# Altium PCB Controller.PcbDoc (part 1 of 2)
Units mil, origin at the board's own origin, x right, y up, seen from the top; angles counter-clockwise.
Board outline 3937.01 x 3937.01 mil, 4 copper layers (Top Layer, GND1, Layer 2, GND2), stack 23.756 mil thick; 99 components, 64 nets, 313 pads, 83 vias.
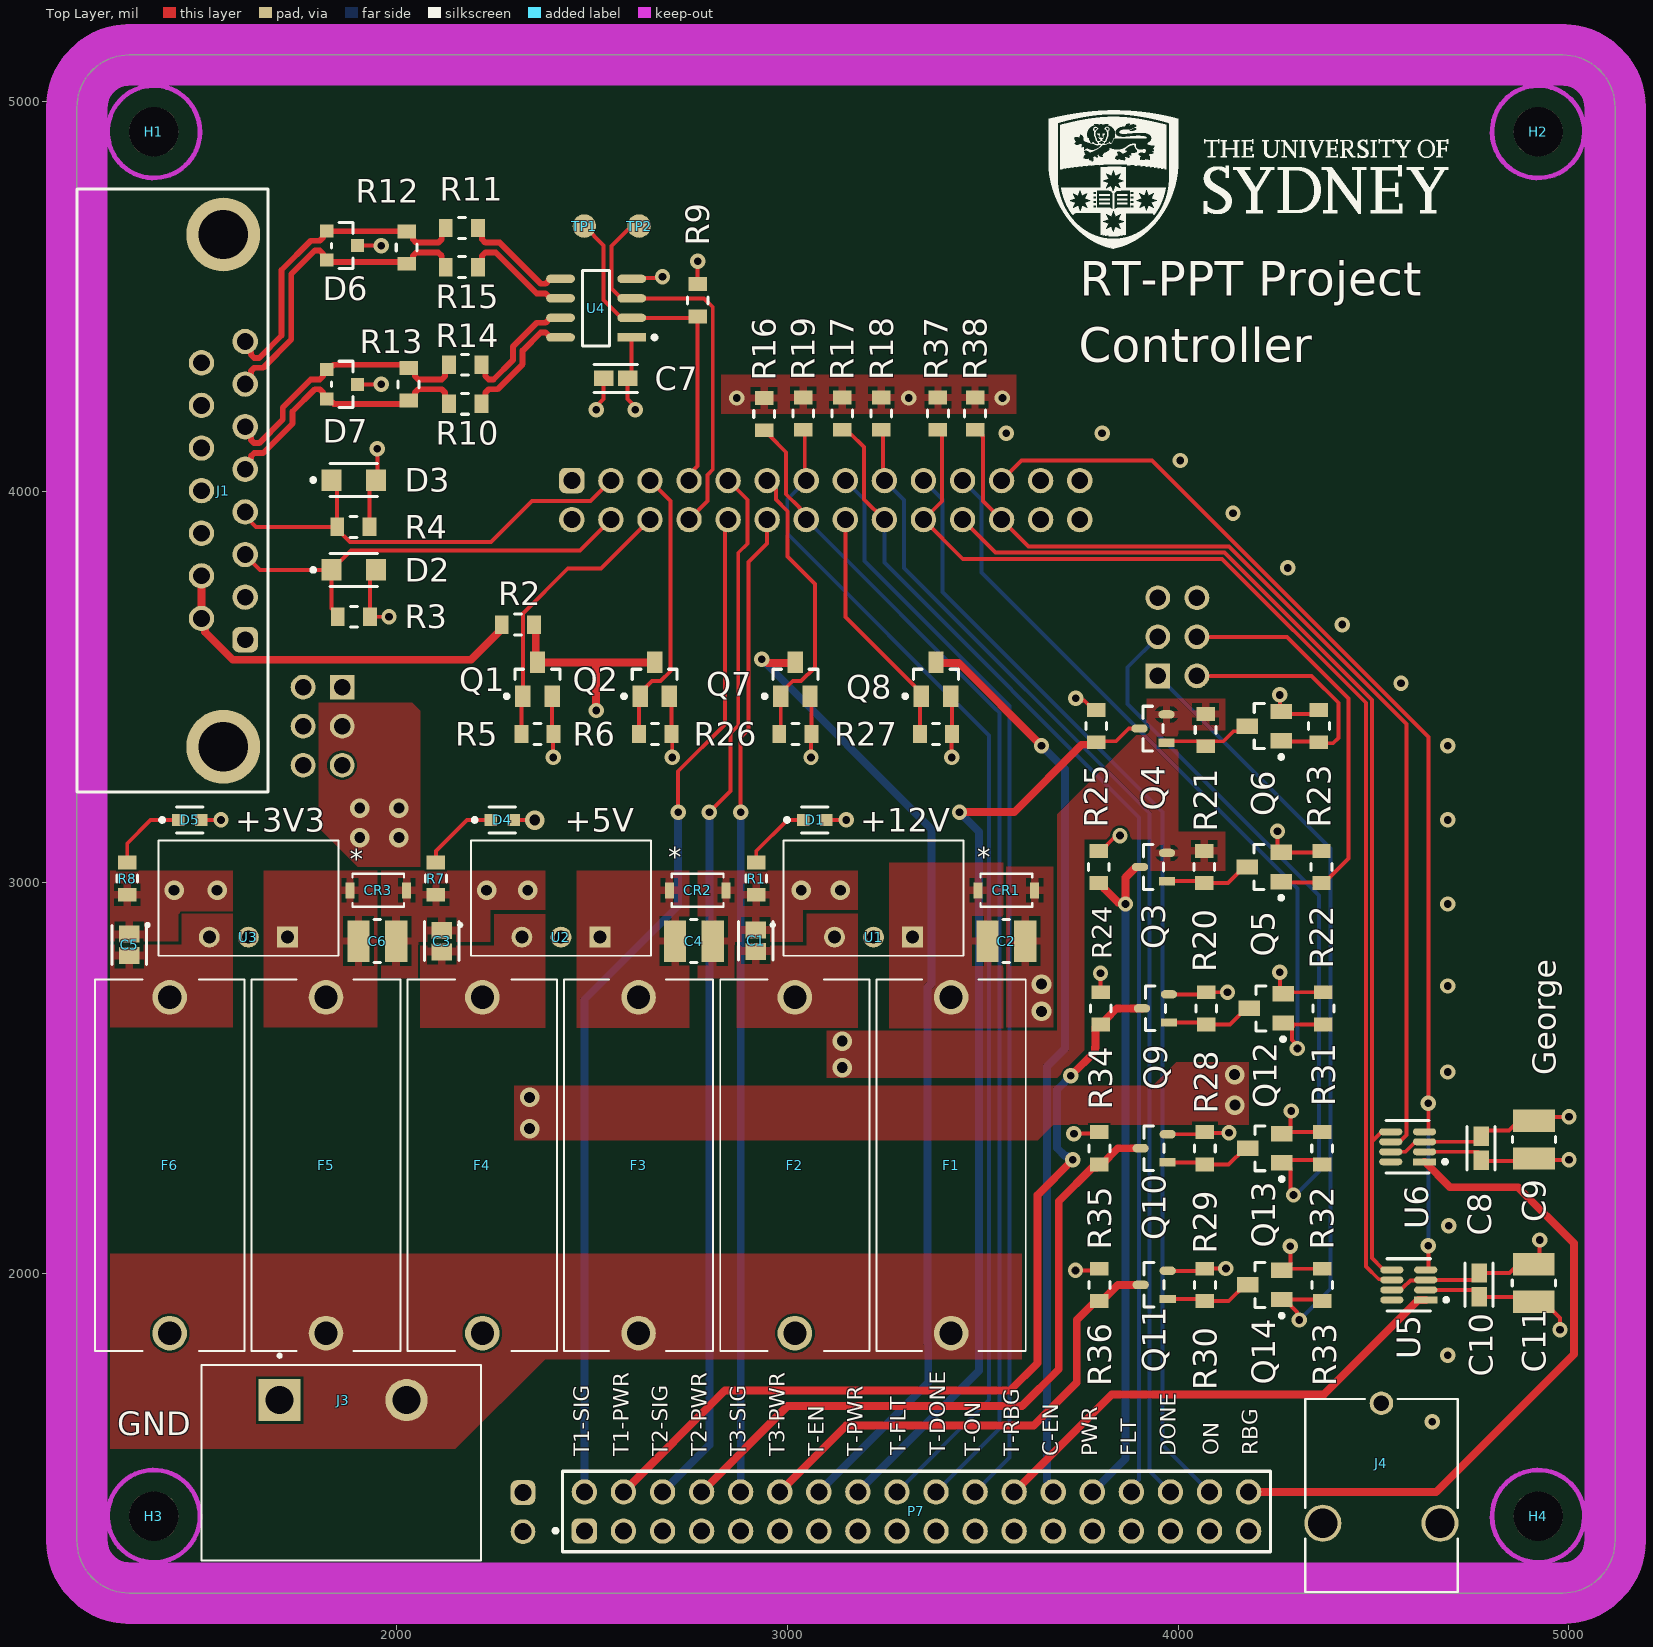
[diagram p0: Top Layer view]
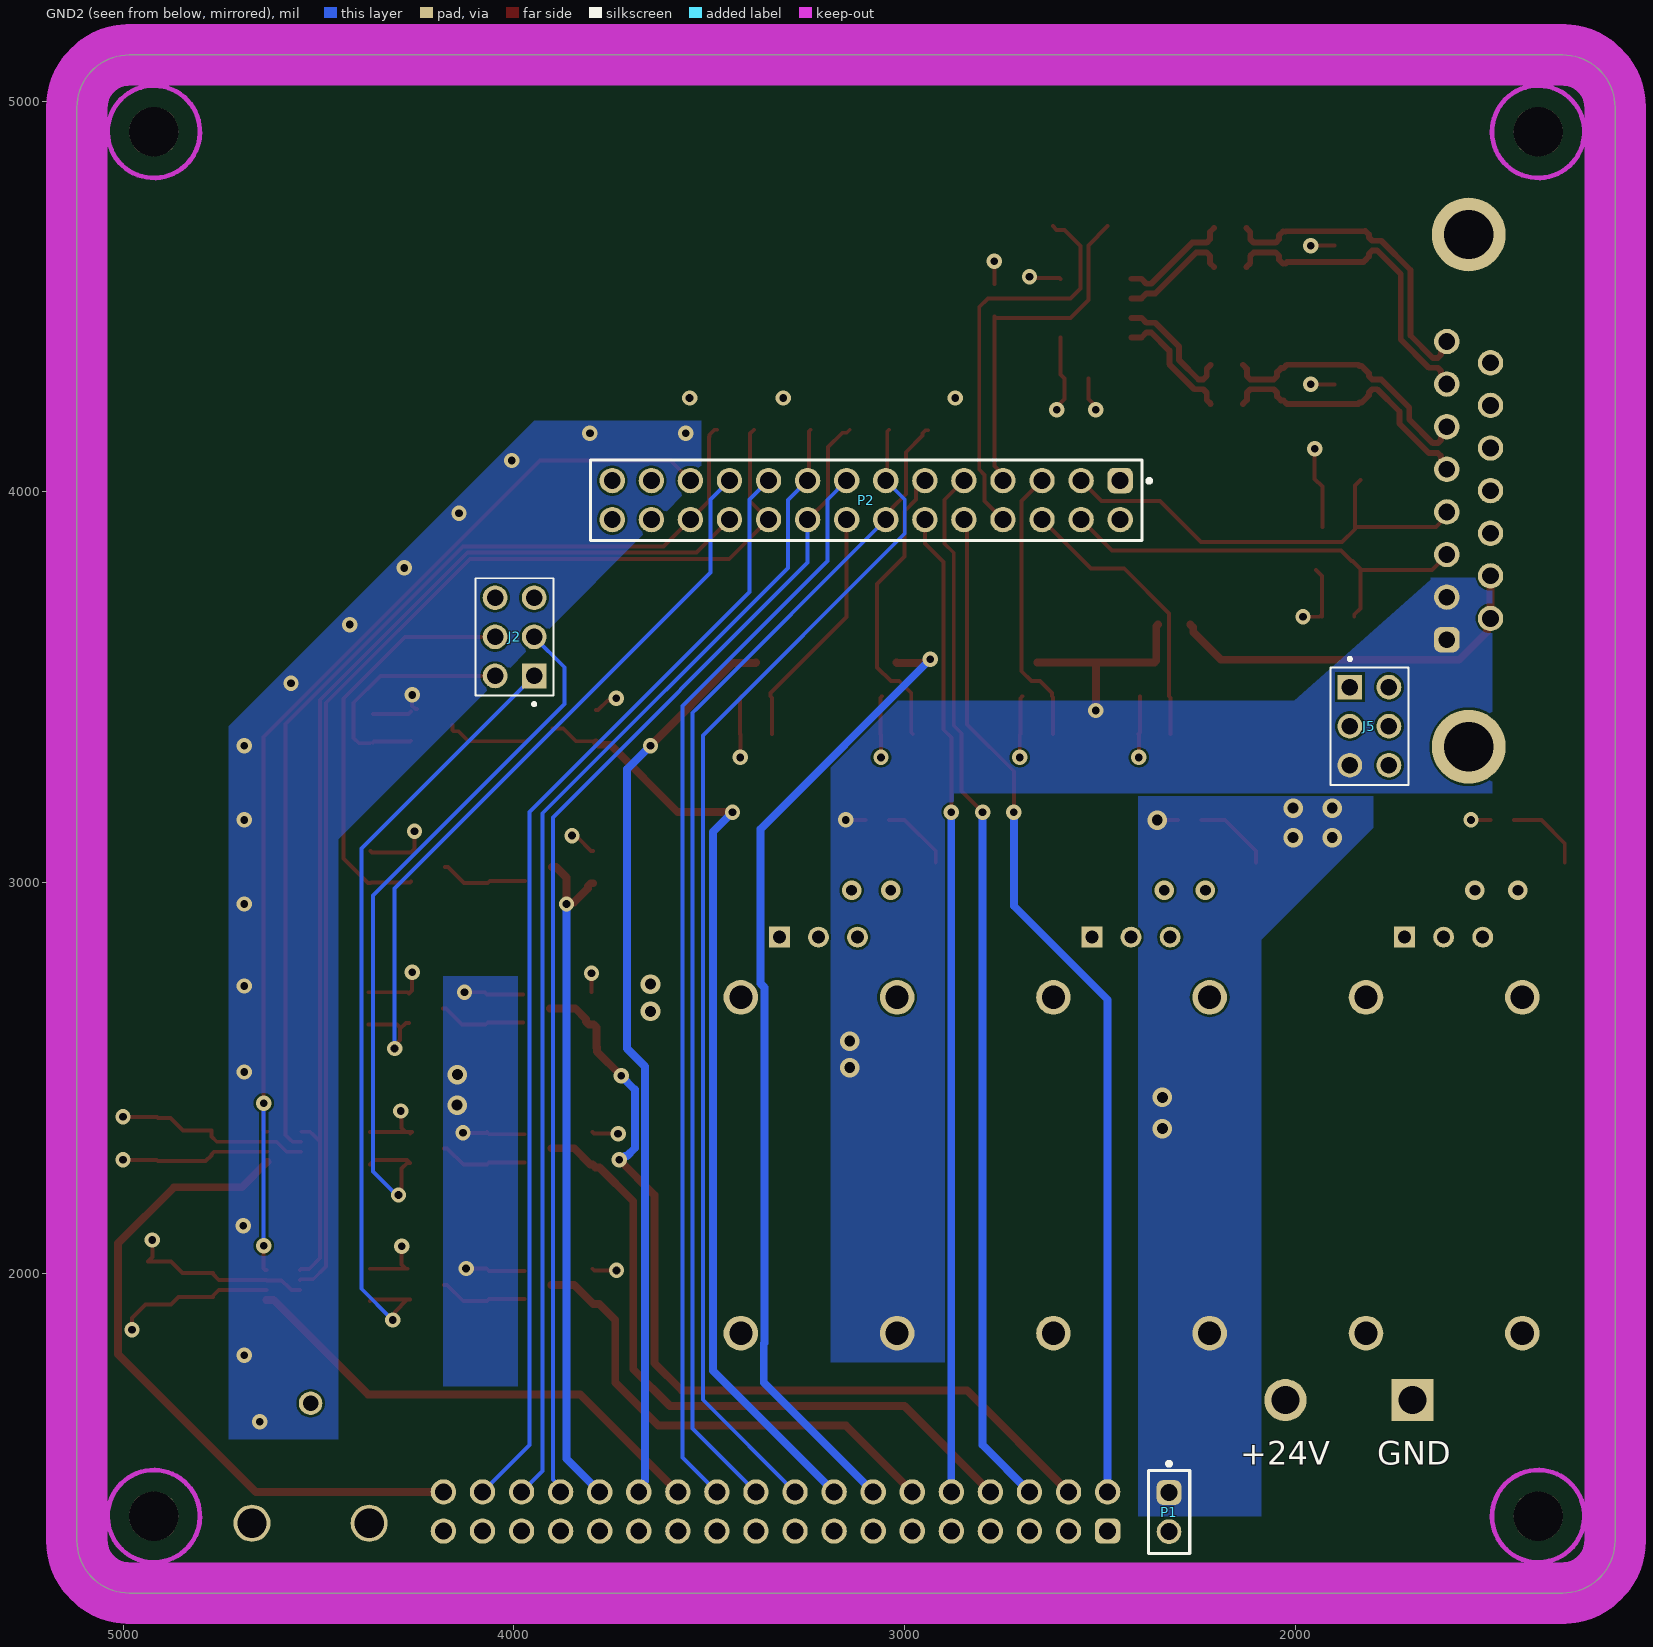
[diagram p1: GND2 view, seen from below]
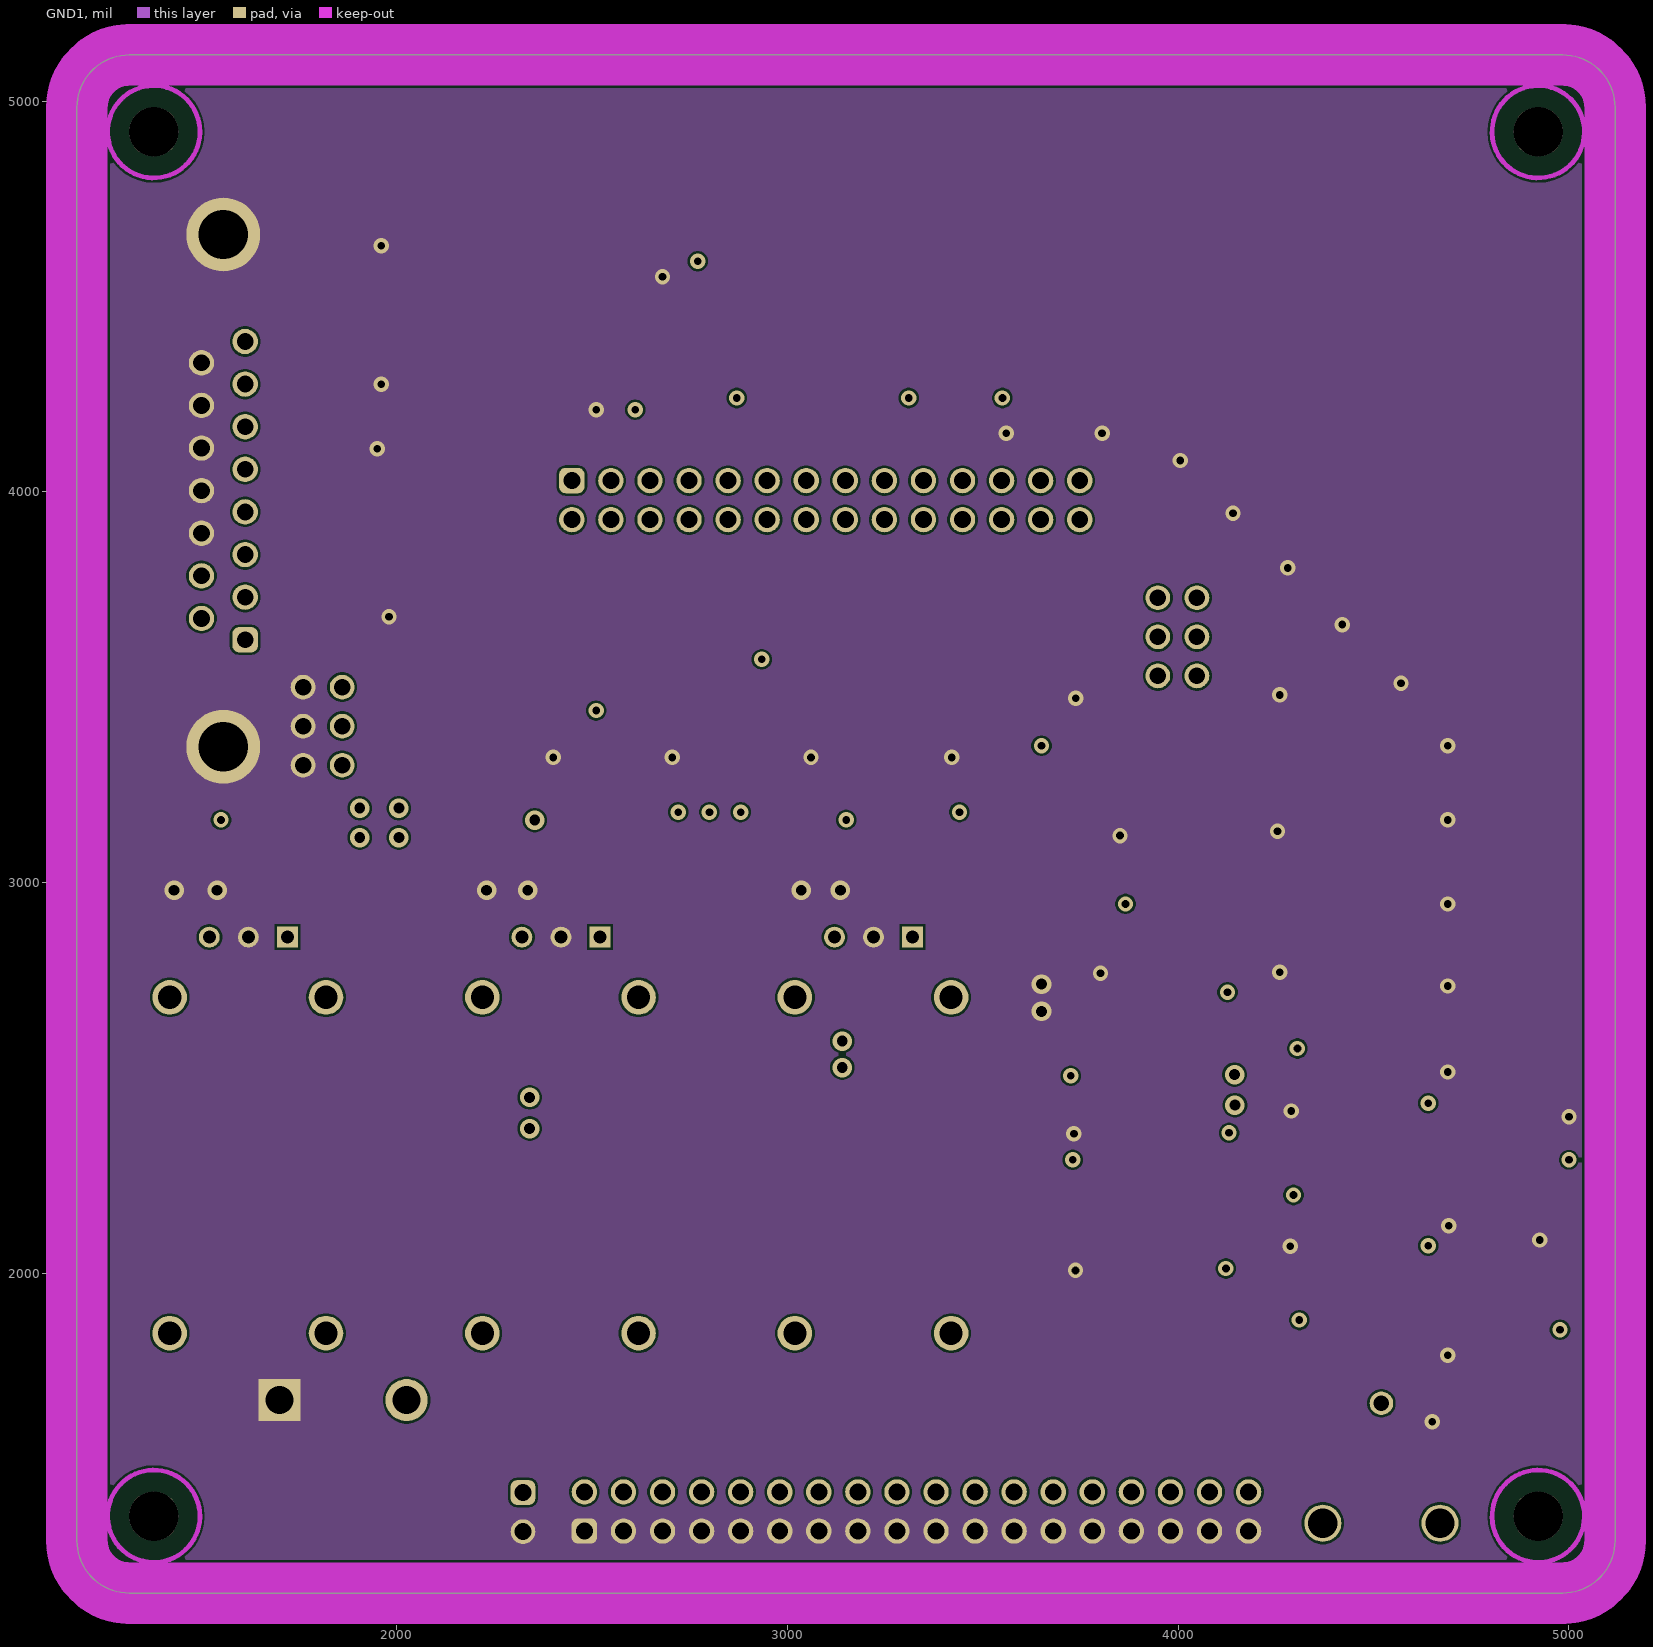
[diagram p2: GND1]
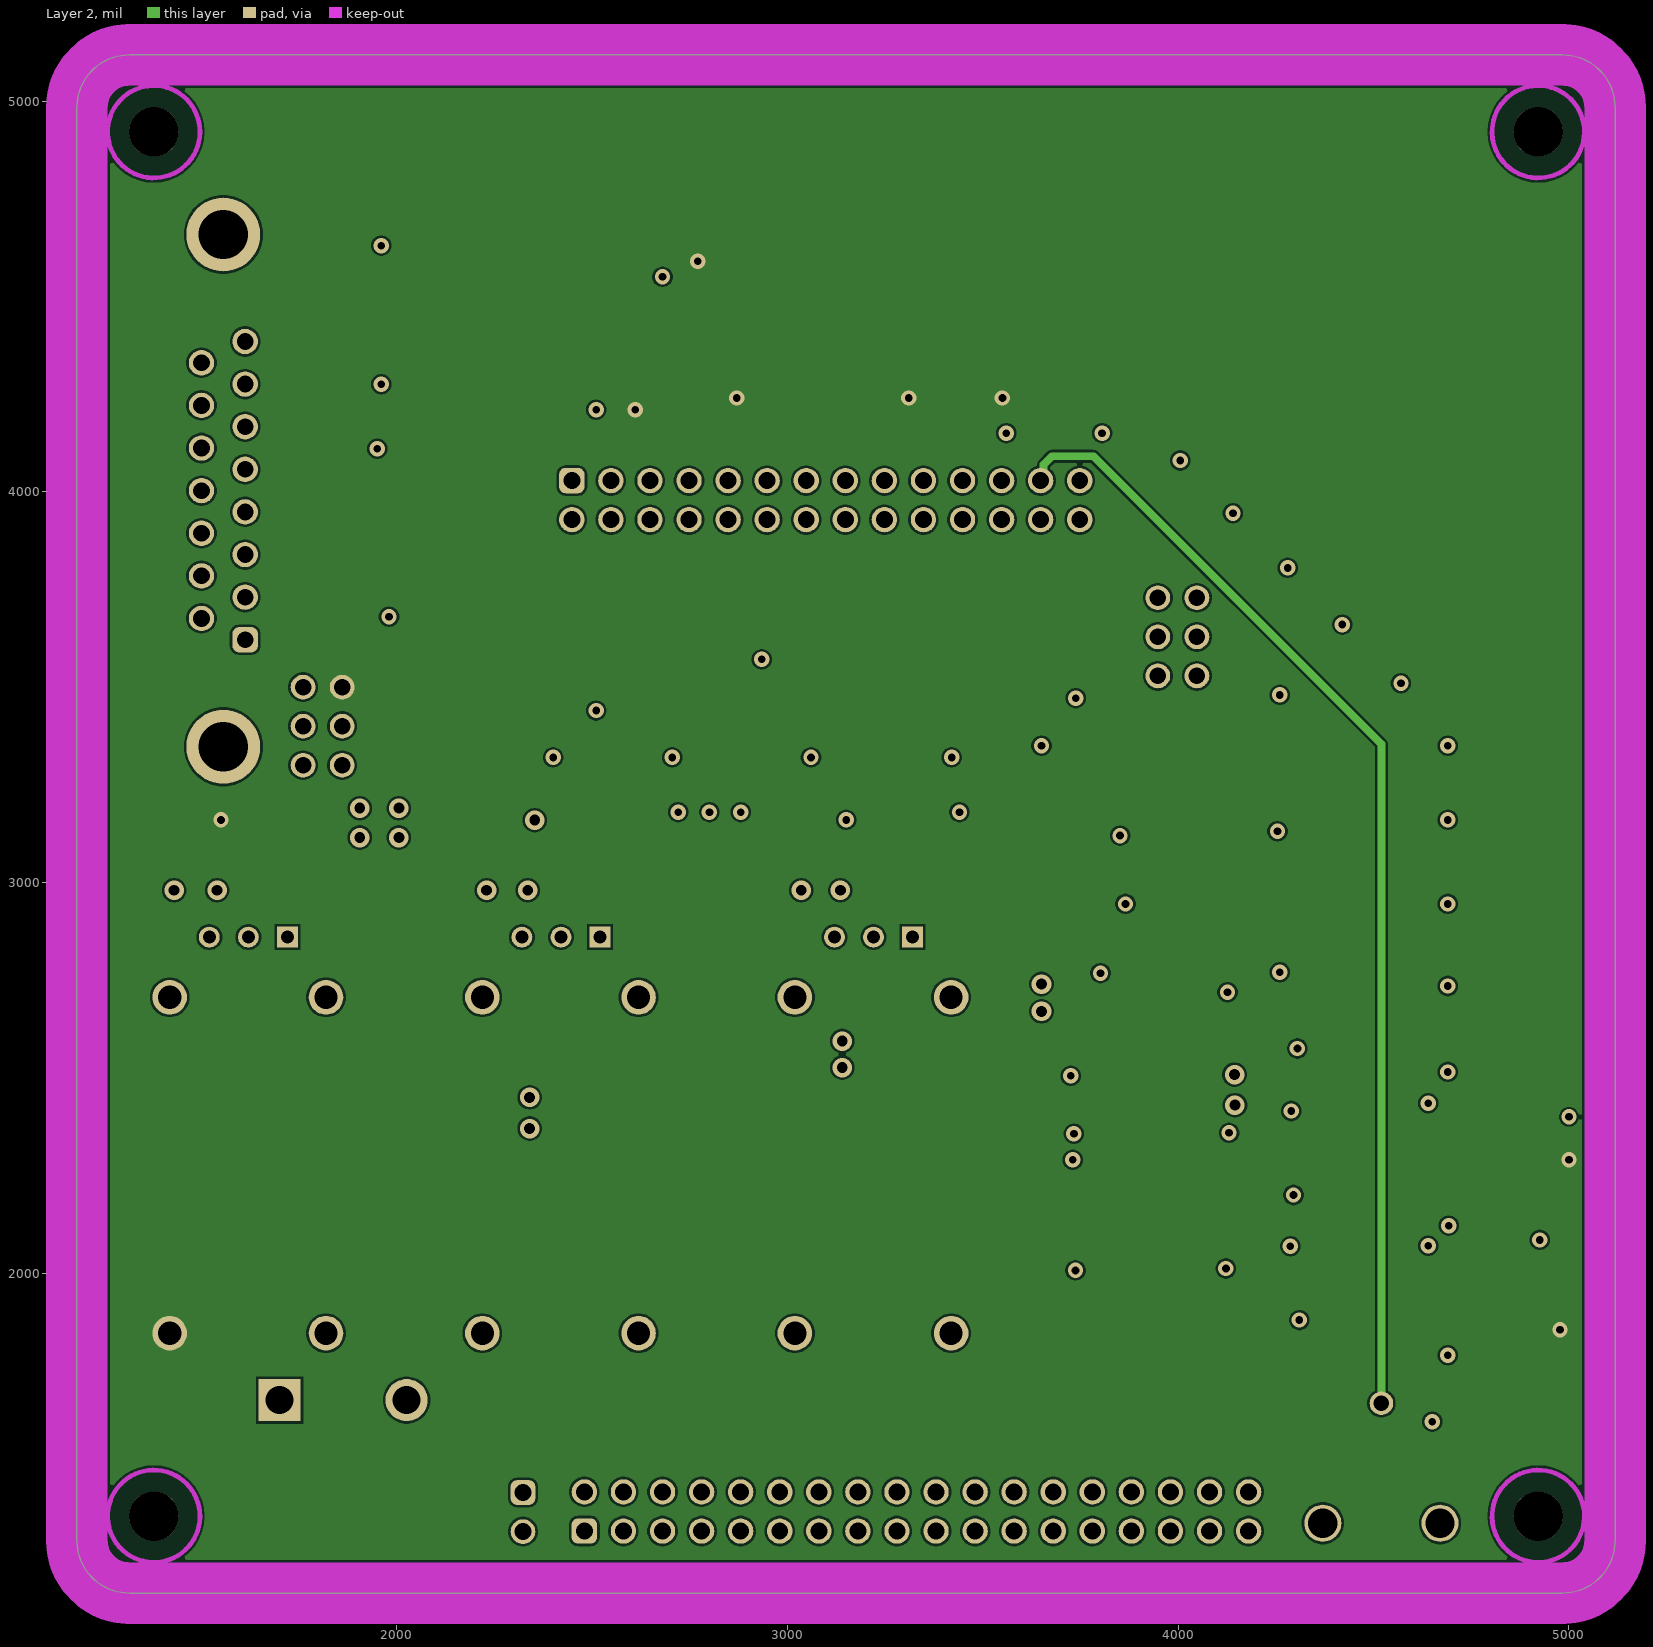
[diagram p3: Layer 2]
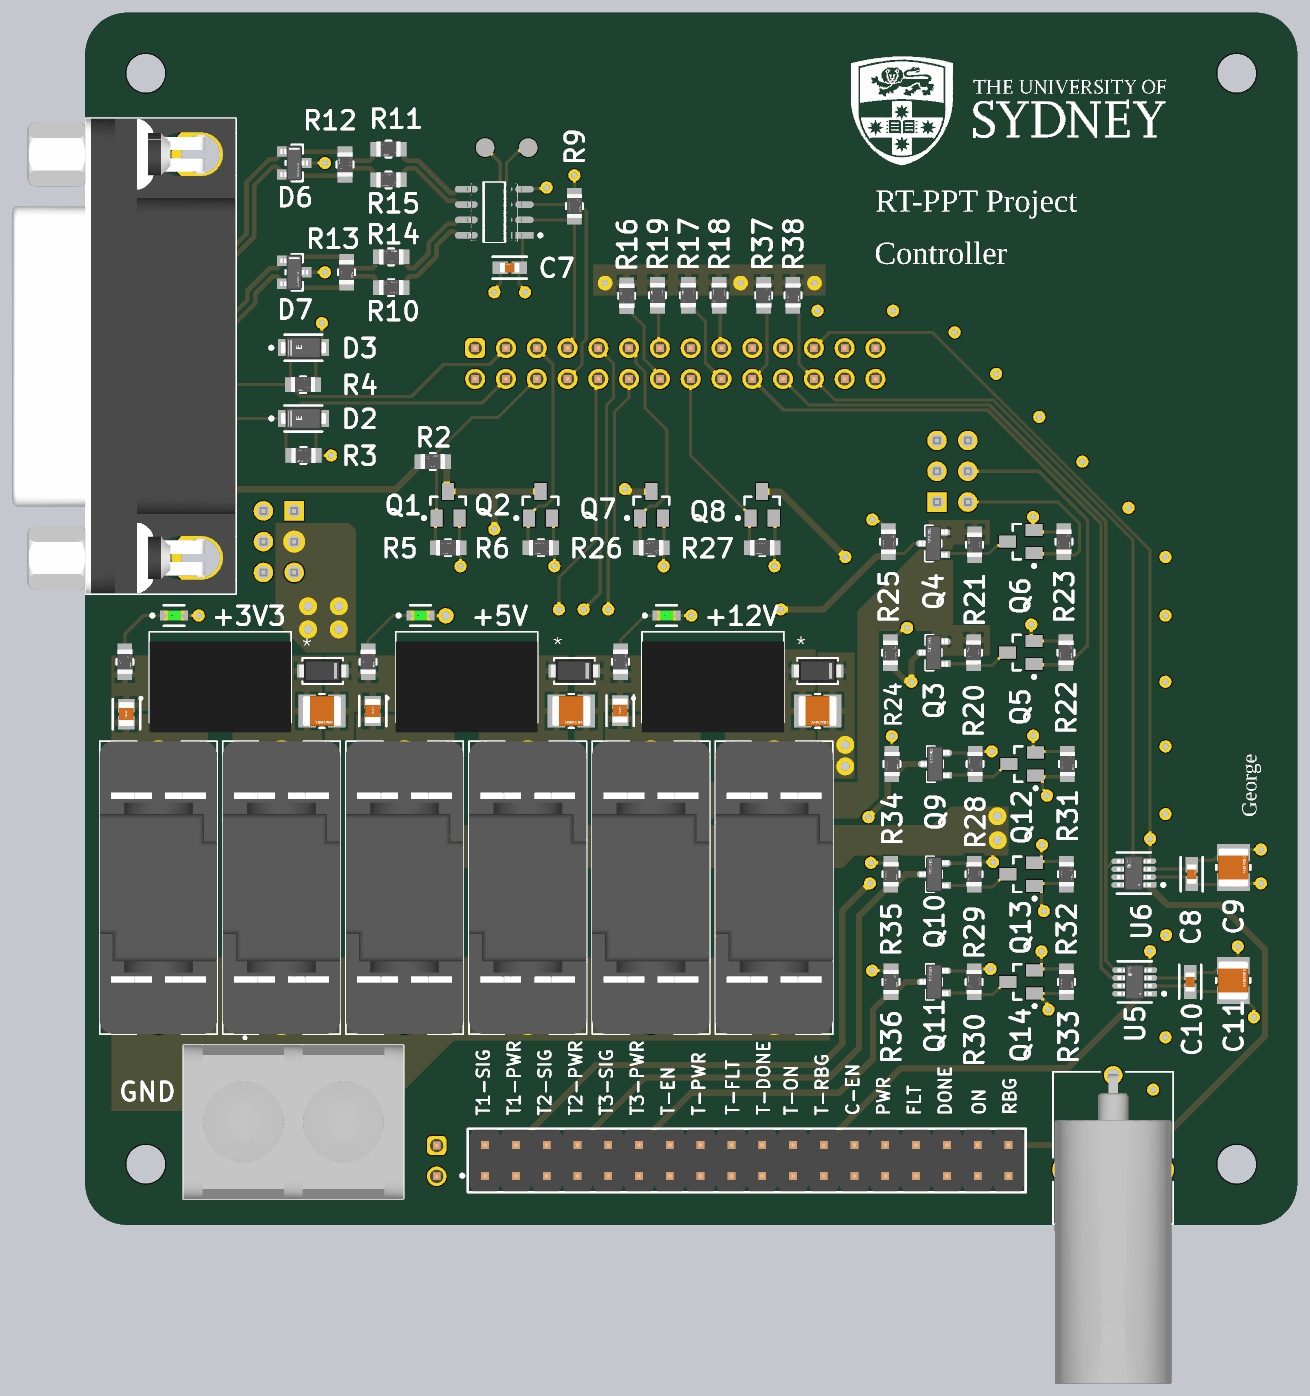
[diagram p4: 3D render of the assembled board from above, using the file's embedded part models]
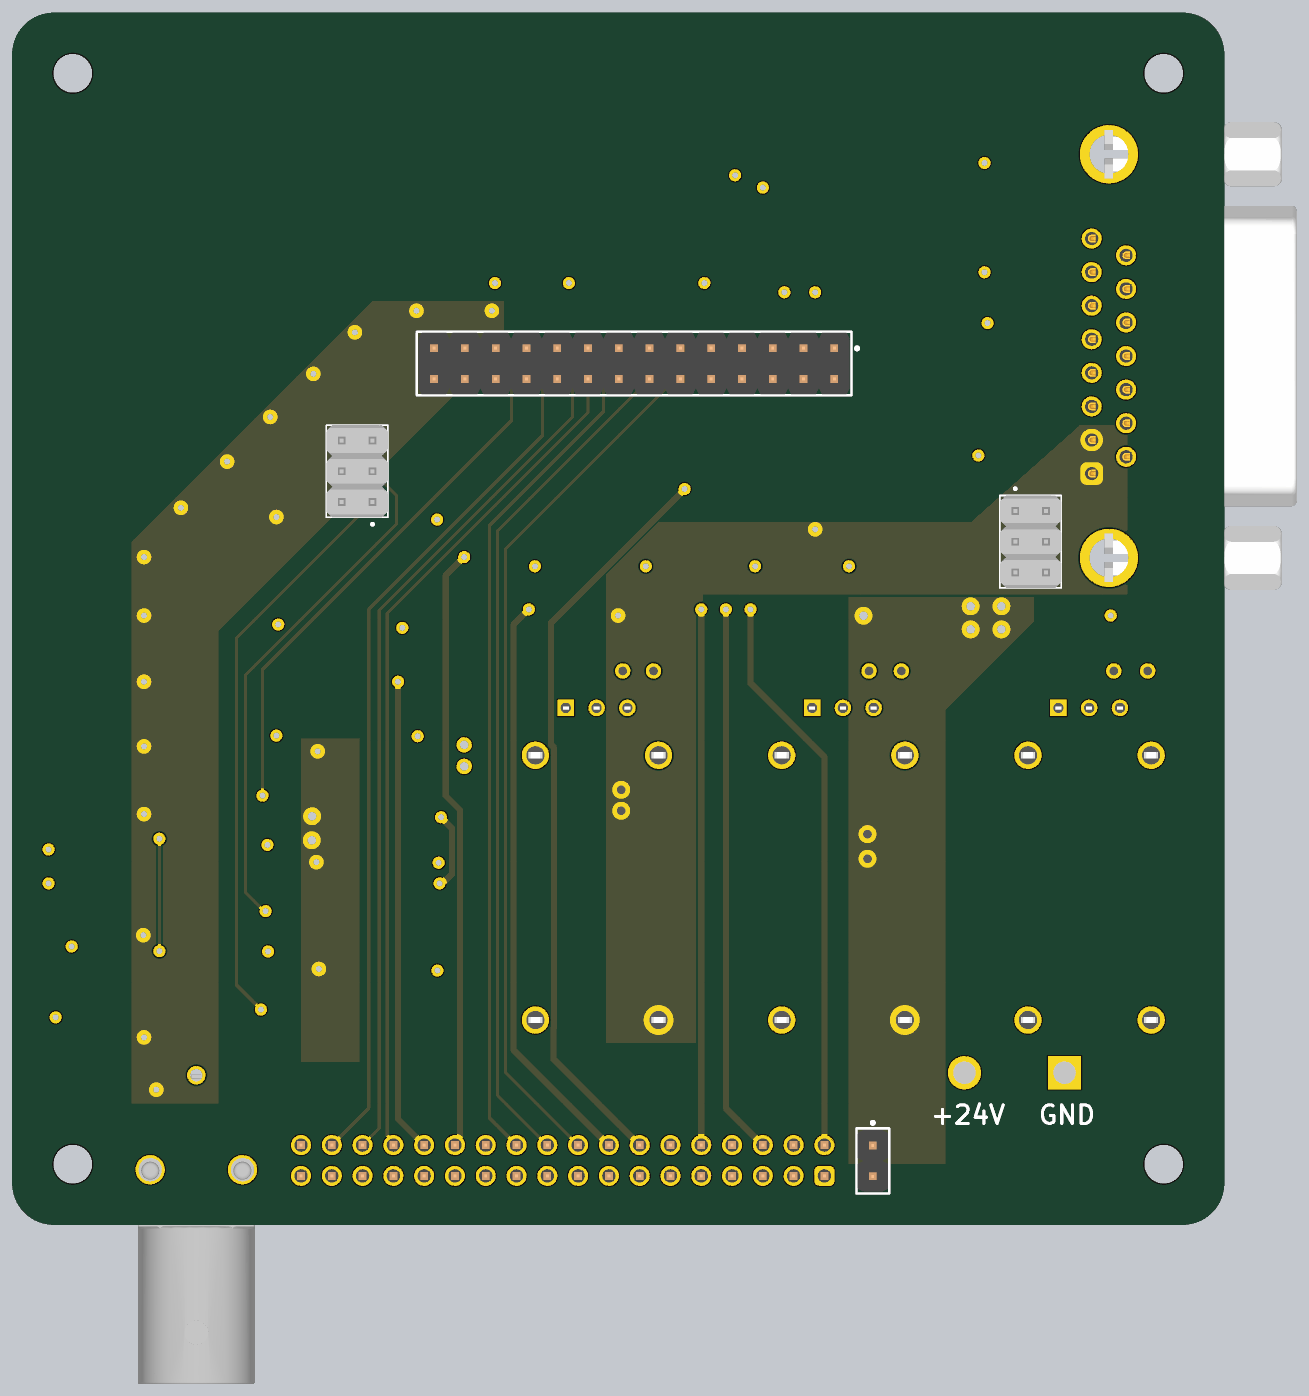
[diagram p5: 3D render of the assembled board from below, using the file's embedded part models]

## Layer stack, top to bottom
Top Solder: solder mask 0.4, Solder Resist, Dk 3.5
Top Layer: signal copper 1.4
Dielectric 2: prepreg 2.8, PP-006, Dk 4.1
GND1: signal copper 1.378
Dielectric 1: dielectric 12.6, FR-4, Dk 4.8
Layer 2: signal copper 1.378
Dielectric 3: prepreg 2.8, PP-006, Dk 4.1
GND2: signal copper 1.4
Bottom Solder: solder mask 0.4, Solder Resist, Dk 3.5

## Board outline
1181.1,1315.52 1181.1,4983.69 cw(c1315.52,4983.69) 1315.52,5118.11 4983.69,5118.11 cw(c4983.69,4983.69) 5118.11,4983.69 5118.11,1315.52 cw(c4983.69,1315.52) 4983.69,1181.1 1315.52,1181.1 cw(c1315.52,1315.52)

## Design rules (kind name [scope] priority, off if disabled: settings)
Clearance [All] p1: gap=6 ignorepadtopadclearanceinfootprint=FALSE
ComponentClearance [All] p1: gap=8 collisioncheckmode=3 verticalgap=8 showdistances=FALSE
DiffPairsRouting [All] p1: maxlimit=10 minlimit=7.87 mostfreqgap=10 toplayer_minwidth=9.84 toplayer_maxwidth=15 toplayer_prefwidth=11.81 midlayer1_minwidth=9.84 midlayer1_maxwidth=15 midlayer1_prefwidth=11.81 midlayer2_minwidth=9.84 midlayer2_maxwidth=15 midlayer2_prefwidth=11.81 bottomlayer_minwidth=9.84 bottomlayer_maxwidth=15 bottomlayer_prefwidth=11.81 maxuncoupledlength=500
HoleSize [All] p1: absolutevalues=TRUE maxlimit=196.85 minlimit=11.81 maxpercent=80.000 minpercent=20.000
HoleToHoleClearance [All] p1: gap=8 allowstackedmicrovias=TRUE
MatchedLengths MDI_*_MatchedLengths [InDifferentialPair ('MDI_2') Or InDifferentialPair ('MDI_3') Or InDifferentialPair ('MDI_1') Or InDifferentialPair ('MDI_0')] p1: tolerance=39.37 checknetsindiffpair=FALSE checkdiffpairvsdiffpair=TRUE checkxsignals=TRUE checkothers=TRUE
MatchedLengths TRX0_MatchedLengths [InDifferentialPair ('TRX0')] p2: tolerance=39.37 checknetsindiffpair=FALSE checkdiffpairvsdiffpair=TRUE checkxsignals=TRUE checkothers=TRUE
MatchedLengths SPE_MatchedLengths [InDifferentialPair ('SPE')] p3: tolerance=39.37 checknetsindiffpair=TRUE checkdiffpairvsdiffpair=FALSE checkxsignals=FALSE checkothers=FALSE
MinimumAnnularRing [All] p1: minimumring=5.91
MinimumSolderMaskSliver [All] p1: minsoldermaskwidth=5.91
PolygonConnect [All] p1: thpad.connectstyle=Direct thpad.reliefconductorwidth=10 thpad.reliefentries=4 thpad.polygonreliefangle="90 Angle" thpad.airgapwidth=10 smdpad.connectstyle=Relief smdpad.reliefconductorwidth=20 smdpad.reliefentries=4 smdpad.polygonreliefangle="90 Angle" smdpad.airgapwidth=10 via.connectstyle=Direct via.reliefconductorwidth=10 via.reliefentries=4 via.polygonreliefangle="90 Angle" via.airgapwidth=10
RoutingVias GND/VIN [InNet('GND') Or InNet('VIN')] p1: holewidth=11.81 width=23.62 viastyle="Through Hole" minholewidth=11.81 minwidth=23.62 maxholewidth=11.81 maxwidth=39.37
RoutingVias [All] p2: holewidth=11.81 width=23.62 viastyle="Through Hole" minholewidth=11.81 minwidth=23.62 maxholewidth=11.81 maxwidth=39.37
SilkToSilkClearance [All] p1: silktosilkclearance=8
SilkToSolderMaskClearance Vias [IsVia] p1: minsilkscreentomaskgap=8 clearancetoexposedcopper=TRUE
SilkToSolderMaskClearance Pads [IsPad] p2: minsilkscreentomaskgap=8 clearancetoexposedcopper=TRUE
SolderMaskExpansion [All] p1: expansion=4 istentingtop=FALSE
SupplyNets "Schematic Supply Nets_16" [InNet('+5V')] p1: voltage=0.000
SupplyNets "Schematic Supply Nets_3" [InNet('+24V')] p2: voltage=0.000
SupplyNets "Schematic Supply Nets_1" [InNet('Dump_LED')] p3: voltage=0.000
SupplyNets "Schematic Supply Nets" [InNet('+3V3')] p4: voltage=0.000
SupplyNets "Schematic Supply Nets_2" [InNet('GND')] p5: voltage=0.000
UnRoutedNet [All] p1: checkbadconnections=TRUE
Width [All] p1: maxlimit=50 minlimit=8 preferedwidth=8
22 further rules are at their usual default settings.

## Classes and differential pairs
differential pair TX: +TX_P -TX_N
differential pair RX: +RX_P -RX_N
differential pair RS422-TX: +RS422-TX_P -RS422-TX_N
differential pair RS422-RX: +RS422-RX_P -RS422-RX_N

## Components (designator, comment, footprint, x,y, rotation, side; value= is the part's Value field where it differs from the comment)
C1 "CC0805MKX5R8BB226" FP-CC0805-0_2-1_45-IPC_C 2918.7,2851.18 r90 top
C2 "CL32B106KBJNNNE" FP-CL32-IPC_C 3560,2850 r0 top
C3 "CC0805MKX5R8BB226" FP-CC0805-0_2-1_45-IPC_C 2115,2850 r90 top
C4 "CL32B106KBJNNNE" FP-CL32-IPC_C 2760,2850 r0 top
C5 "CC0805MKX5R8BB226" FP-CC0805-0_2-1_45-IPC_C 1315,2840 r90 top
C6 "CL32B106KBJNNNE" FP-CL32-IPC_C 1950,2850 r0 top
C7 "0.1uF" FP-CC0603-DA-IPC_A 2560,4290 r0 top
C8 "0.1uF" FP-CC0603-DA-IPC_A 4775,2320 r270 top
C9 "CL32B106KBJNNNE" FP-CL32-IPC_C 4910.47,2341.85 r90 top
C10 "0.1uF" FP-CC0603-DA-IPC_A 4770,1970 r270 top
C11 "CL32B106KBJNNNE" FP-CL32-IPC_C 4910,1974.88 r90 top
CR1 "SMF33A-TP" SOD-123FL_MCC 3560,2980 r0 top
CR2 "SMF33A-TP" SOD-123FL_MCC 2770,2980 r0 top
CR3 "SMF33A-TP" SOD-123FL_MCC 1952.5,2980 r0 top
D1 "LTST-C190GKT" FP-LTST-C190GKT-MFG 3069.53,3160 r0 top
D2 "SMF3.3" FP-SMF3_3-MFG 1890,3800 r0 top
D3 "SMF3.3" FP-SMF3_3-MFG 1890,4030 r0 top
D4 "LTST-C190GKT" FP-LTST-C190GKT-MFG 2270,3160 r0 top
D5 "LTST-C190GKT" FP-LTST-C190GKT-MFG 1470,3160 r0 top
D6 "CDSOT23-SM712" FP-SOT23-MFG 1860,4630 r0 top value=75pF
D7 "CDSOT23-SM712" FP-SOT23-MFG 1860,4275 r0 top value=75pF
F1 "4527" FUSE_4527 3418.7,2276.18 r90 top
F2 "4527" FUSE_4527 3018.7,2276.18 r270 top
F3 "4527" FUSE_4527 2618.7,2276.18 r90 top
F4 "4527" FUSE_4527 2218.7,2276.18 r270 top
F5 "4527" FUSE_4527 1818.7,2276.18 r90 top
F6 "4527" FUSE_4527 1418.7,2276.18 r270 top
H1 "M3_Hole" M3_HOLE 1377.95,4921.26 r0 top
H2 "M3_Hole" M3_HOLE 4921.26,4921.26 r0 top
H3 "M3_Hole" M3_HOLE 1377.95,1377.95 r0 top
H4 "M3_Hole" M3_HOLE 4921.26,1377.95 r0 top
J1 "618015231121" 618015231121 1425.98,4002.83 r270 top
J2 "M20-9980346" HARWIN_M20-9980346 3997.83,3628.58 r90 bottom locked
J3 "4DB-P108-02" TE_2-1437667-4 1700,1675 r0 top locked
J4 "731000105" CONN_73100-0105_MOL 4520,1667 r180 top
J5 "M20-9980346" HARWIN_M20-9980346 1810,3400 r270 bottom
P1 "61300211121" 61300211121 2322.83,1388.58 r270 bottom locked
P2 "61302821121" 61302821121 3097.83,3978.58 r0 bottom locked
P7 "61303621121" 61303621121 3330,1390 r0 top locked
Q1 "BSS123" FAIR-SOT23-3_V 2360,3520 r0 top
Q2 "BSS123" FAIR-SOT23-3_V 2660,3520 r0 top
Q3 "DMP4065SQ-7" FP-SOT23-IPC_C 3936.61,3039.53 r180 top
Q4 "DMP4065SQ-7" FP-SOT23-IPC_C 3935.48,3393.98 r180 top
Q5 "BSS123" FAIR-SOT23-3_V 4219.92,3039.53 r90 top
Q6 "BSS123" FAIR-SOT23-3_V 4220,3400 r90 top
Q7 "BSS123" FAIR-SOT23-3_V 3020,3520 r0 top
Q8 "BSS123" FAIR-SOT23-3_V 3380,3520 r0 top
Q9 "DMP4065SQ-7" FP-SOT23-IPC_C 3941.57,2677.64 r180 top
Q10 "DMP4065SQ-7" FP-SOT23-IPC_C 3938.19,2319.53 r180 top
Q11 "DMP4065SQ-7" FP-SOT23-IPC_C 3938.35,1970 r180 top
Q12 "BSS123" FAIR-SOT23-3_V 4224.88,2677.64 r90 top
Q13 "BSS123" FAIR-SOT23-3_V 4221.5,2319.53 r90 top
Q14 "BSS123" FAIR-SOT23-3_V 4221.65,1970 r90 top
R1 "RT0805FRE071K2L" FP-RT0805-MFG 2920,3010 r270 top value=1.2KΩ
R2 "RT0805BRE0740K2L" FP-RT0805-MFG 2310,3660 r0 top value=40.2KΩ
R3 "RT0805FRE0710KL" FP-RT0805-MFG 1890,3680 r180 top value=10KΩ
R4 "RT0805FRE0710KL" FP-RT0805-MFG 1888.66,3910 r180 top value=10KΩ
R5 "RT0805FRE0710KL" FP-RT0805-MFG 2360,3380 r180 top value=10KΩ
R6 "RT0805FRE0710KL" FP-RT0805-MFG 2661.34,3380 r180 top value=10KΩ
R7 "RT0805FRE07510RL" FP-RT0805-MFG 2100,3010 r270 top value=510Ω
R8 "RT0805FRE07330RL" FP-RT0805-MFG 1310,3010 r270 top value=330Ω
R9 "RT0805FRE0710KL" FP-RT0805-MFG 2770,4490 r270 top value=10KΩ
R10 "RT0805FRE0710RL" FP-RT0805-MFG 2175,4225 r0 top value=10Ω
R11 "RT0805FRE0710RL" FP-RT0805-MFG 2166.34,4675 r180 top value=10Ω
R12 "RT0805FRE07100RL" FP-RT0805-MFG 2025,4625 r90 top value=100Ω
R13 "RT0805FRE07100RL" FP-RT0805-MFG 2030,4275 r270 top value=100Ω
R14 "RT0805FRE0710RL" FP-RT0805-MFG 2175,4325 r0 top value=10Ω
R15 "RT0805FRE0710RL" FP-RT0805-MFG 2166.34,4575 r180 top value=10Ω
R16 "RT0805FRE0710KL" FP-RT0805-MFG 2940,4198.66 r90 top value=10KΩ
R17 "RT0805FRE0710KL" FP-RT0805-MFG 3140,4200 r90 top value=10KΩ
R18 "RT0805FRE0710KL" FP-RT0805-MFG 3240,4200 r90 top value=10KΩ
R19 "RT0805FRE0710KL" FP-RT0805-MFG 3040,4200 r90 top value=10KΩ
R20 "RT0805FRE0710KL" FP-RT0805-MFG 4066.61,3039.53 r90 top value=10KΩ
R21 "RT0805FRE0710KL" FP-RT0805-MFG 4070,3390 r90 top value=10KΩ
R22 "RT0805BRD0733KL" FP-RT0805-MFG 4366.61,3039.53 r270 top value=33KΩ
R23 "RT0805BRD0733KL" FP-RT0805-MFG 4360,3400 r270 top value=33KΩ
R24 "RT0805FRE0710KL" FP-RT0805-MFG 3796.61,3039.53 r270 top value=10KΩ
R25 "RT0805FRE0710KL" FP-RT0805-MFG 3790,3400 r270 top value=10KΩ
R26 "RT0805BRD0733KL" FP-RT0805-MFG 3020,3380 r180 top value=33KΩ
R27 "RT0805BRD0733KL" FP-RT0805-MFG 3380,3380 r180 top value=33KΩ
R28 "RT0805FRE0710KL" FP-RT0805-MFG 4071.57,2677.64 r90 top value=10KΩ
R29 "RT0805FRE0710KL" FP-RT0805-MFG 4068.19,2319.53 r90 top value=10KΩ
R30 "RT0805FRE0710KL" FP-RT0805-MFG 4068.35,1970 r90 top value=10KΩ
R31 "RT0805BRD0733KL" FP-RT0805-MFG 4371.57,2677.64 r270 top value=33KΩ
R32 "RT0805BRD0733KL" FP-RT0805-MFG 4368.19,2319.53 r270 top value=33KΩ
R33 "RT0805BRD0733KL" FP-RT0805-MFG 4368.35,1970 r270 top value=33KΩ
R34 "RT0805FRE0710KL" FP-RT0805-MFG 3801.57,2677.64 r270 top value=10KΩ
R35 "RT0805FRE0710KL" FP-RT0805-MFG 3798.19,2319.53 r270 top value=10KΩ
R36 "RT0805FRE0710KL" FP-RT0805-MFG 3798.35,1970 r270 top value=10KΩ
R37 "RT0805FRE0710KL" FP-RT0805-MFG 3385,4200 r270 top value=10KΩ
R38 "RT0805FRE0710KL" FP-RT0805-MFG 3480,4200 r270 top value=10KΩ
TP1 "Test Point" TEST_PAD 2480,4680 r180 top
TP2 "Test Point" TEST_PAD 2620,4680 r270 top
U1 "N7812-1PV" CONV_TSR_1-2433 3220,2960 r0 top
U2 "N7805-1PV" CONV_TSR_1-2433 2420,2960 r0 top
U3 "N7803-1PV" CONV_TSR_1-2433 1620,2960 r0 top
U4 "SN65HVD77DR" FP-D0008A-IPC_C 2510,4470 r180 top
U5 "AD5160BRJZ10-RL7" FP-RJ-8-IPC_B 4590,1970 r180 top
U6 "AD5160BRJZ10-RL7" FP-RJ-8-IPC_B 4587.15,2323.46 r180 top

## Footprints (in the part's own frame and the unit in brackets; to place one, negate y for a bottom-side part, rotate by r counter-clockwise, add the part's x,y. Pads: shape width x height; smd on the part's side, far side on the other; paste and mask are expansions set on the pad)
61300211121 [mm] "Pin Header, pitch 2.54 mm, THT, Vertical, single row, 2p"
  rrect50% 1.6x1.6 hole 1.1: 1(-1.27,0)
  round 1.6 hole 1.1: 2(1.27,0)
  silkscreen extent -3.26,-1.35 2.69,1.35, body extent -2.54,-1.27 2.54,1.27, height 8.57
61302821121 [mm] "Pin Header, pitch 2.54 mm, THT, Vertical, dual row, 28p"
  rrect50% 1.65x1.65 hole 1.1: 1(-16.51,-1.27)
  round 1.65 hole 1.1: 2(-16.51,1.27) 3(-13.97,-1.27) 4(-13.97,1.27) 5(-11.43,-1.27) 6(-11.43,1.27) 7(-8.89,-1.27) 8(-8.89,1.27) 9(-6.35,-1.27) 10(-6.35,1.27) 11(-3.81,-1.27) 12(-3.81,1.27) 13(-1.27,-1.27) 14(-1.27,1.27) 15(1.27,-1.27) 16(1.27,1.27) 17(3.81,-1.27) 18(3.81,1.27) 19(6.35,-1.27) 20(6.35,1.27) 21(8.89,-1.27) 22(8.89,1.27) 23(11.43,-1.27) 24(11.43,1.27) 25(13.97,-1.27) 26(13.97,1.27) 27(16.51,-1.27) 28(16.51,1.27)
  silkscreen extent -18.51,-2.62 17.93,2.62, body extent -17.78,-2.54 17.78,2.54, height 8.59
61303621121 [mm] "Pin Header, pitch 2.54 mm, THT, Vertical, dual row, 36p"
  rrect50% 1.65x1.65 hole 1.1: 1(-21.59,-1.27)
  round 1.65 hole 1.1: 2(-21.59,1.27) 3(-19.05,-1.27) 4(-19.05,1.27) 5(-16.51,-1.27) 6(-16.51,1.27) 7(-13.97,-1.27) 8(-13.97,1.27) 9(-11.43,-1.27) 10(-11.43,1.27) 11(-8.89,-1.27) 12(-8.89,1.27) 13(-6.35,-1.27) 14(-6.35,1.27) 15(-3.81,-1.27) 16(-3.81,1.27) 17(-1.27,-1.27) 18(-1.27,1.27) 19(1.27,-1.27) 20(1.27,1.27) 21(3.81,-1.27) 22(3.81,1.27) 23(6.35,-1.27) 24(6.35,1.27) 25(8.89,-1.27) 26(8.89,1.27) 27(11.43,-1.27) 28(11.43,1.27) 29(13.97,-1.27) 30(13.97,1.27) 31(16.51,-1.27) 32(16.51,1.27) 33(19.05,-1.27) 34(19.05,1.27) 35(21.59,-1.27) 36(21.59,1.27)
  silkscreen extent -23.59,-2.62 23.01,2.62, body extent -22.86,-2.54 22.86,2.54, height 8.59
618015231121 [mm] "15 pins, right angled, 8.08mm, with hex screw"
  rrect50% 1.65x1.65 hole 1.09: 1(9.695,4.72)
  round 1.65 hole 1.09: 2(6.925,4.72) 3(4.155,4.72) 4(1.385,4.72) 5(-1.385,4.72) 6(-4.155,4.72) 7(-6.925,4.72) 8(-9.695,4.72) 9(8.31,1.88) 10(5.54,1.88) 11(2.77,1.88) 12(0,1.88) 13(-2.77,1.88) 14(-5.54,1.88) 15(-8.31,1.88)
  round 4.8 hole 3.2: M1(-16.65,3.3) M2(16.65,3.3)
  silkscreen extent -19.6,-6.2 19.6,6.2, body extent -19.6,-12.2 19.6,6.2, height 12.55
CONN_73100-0105_MOL [mil]
  round 60 hole 40: 1(0,0)
  round 95 hole 75: 2(-150,307) 3(150,307)
  silkscreen extent -195,-11 195,483, body extent -190,-3 190,1003, height 367
CONV_TSR_1-2433 [mm]
  rect 1.358x1.358 hole 0.85: 1(2.54,-2.54)
  round 1.358 hole 0.85: 2(0,-2.54) 3(-2.54,-2.54)
  silkscreen extent -6.65,-3.75 5.85,3.75, body extent -5.85,-4.55 5.85,2.95, height 10.1
FAIR-SOT23-3_V [mm] "SOT23, 3-Leads, Body 2.92x1.3mm, Pitch 0.95mm"
  rect 1x1.4 smd: 1(-0.95,-1.1) 2(0.95,-1.1) 3(0,1.1)
  silkscreen extent -2.12,-1.22 1.46,0.65, body extent -1.46,-0.65 1.46,0.65, height 1.2
FP-CC0603-DA-IPC_A [mil]
  rect 49.53x39.85 smd paste+0 mask+0: 1(-30.59,0) 2(30.59,0)
  silkscreen extent -55,-36 55,36, body extent -75,-40 75,40, height 10
FP-CC0805-0_2-1_45-IPC_C [mil]
  rect 43.49x53.39 smd paste+0 mask+0: 1(-27.59,0) 2(27.59,0)
  silkscreen extent -49,-44 49,44, body extent -53,-32 53,32, height 10
FP-CL32-IPC_C [mil]
  rect 57.19x106.46 smd paste+0 mask+0: 1(-48.24,0) 2(48.24,0)
  silkscreen extent -8,-55 8,55, body extent -81,-59 81,59, height 10
FP-D0008A-IPC_C [mil]
  rect 73.59x21.34 smd paste+0 mask+0: 1(-91.09,75)
  rrect100% 73.59x21.34 smd paste+0 mask+0: 2(-91.09,25) 3(-91.09,-25) 4(-91.09,-75) 5(91.09,-75) 6(91.09,-25) 7(91.09,25) 8(91.09,75)
  silkscreen extent -154,-97 35,97, body extent -132,-100 132,100, height 10
FP-LTST-C190GKT-MFG [mm]
  rect 0.8x0.8 smd paste+0 mask+0: 1(-0.75,0) 2(0.75,0)
  silkscreen extent -1.92,-0.85 0.85,0.85, body extent -1.25,-0.55 1.25,0.55, height 0.25
FP-RJ-8-IPC_B [mm]
  rect 1.505x0.455 smd paste+0 mask+0: 1(-1.1,0.975)
  rrect100% 1.505x0.455 smd paste+0 mask+0: 2(-1.1,0.325) 3(-1.1,-0.325) 4(-1.1,-0.975) 5(1.1,-0.975) 6(1.1,-0.325) 7(1.1,0.325) 8(1.1,0.975)
  silkscreen extent -2.55,-1.7 1.4,1.7, body extent -2.1,-1.7 2.1,1.7, height 0.25
FP-RT0805-MFG [mm]
  rect 0.9x1.2 smd paste+0 mask+0: 1(-1.05,0) 2(1.05,0)
  silkscreen extent -0.23,-0.67 0.23,0.67, body extent -1.6,-0.77 1.6,0.77, height 0.25
FP-SMF3_3-MFG [mm]
  rect 1.3x1.4 smd paste+0 mask+0: 1(-1.45,0) 2(1.45,0)
  silkscreen extent -2.77,-1.07 1.55,1.07, body extent -2.2,-1.1 2.2,1.1, height 0.25
FP-SOT23-IPC_C [mm]
  rect 1.059x0.547 smd paste+0 mask+0: 1(-0.877,0.915)
  rrect100% 1.059x0.547 smd paste+0 mask+0: 2(-0.877,-0.915) 3(0.877,0)
  silkscreen extent -0.65,-1.45 0.65,1.45, body extent -1.51,-1.55 1.51,1.55, height 0.25
FP-SOT23-MFG [mm]
  rect 0.85x0.85 smd paste+0 mask+0: 1(-1,0.95) 2(-1,-0.95) 3(1,0)
  silkscreen extent -0.7,-1.5 0.7,1.5, body extent -1.53,-1.6 1.53,1.6, height 0.25
FUSE_4527 [mm]
  round 2.25 hole 1.5: 1(-10.92,0) 2(10.92,0)
  silkscreen extent -12.08,-4.85 12.08,4.85, body extent -12.08,-4.85 12.08,4.85, height 10.79
HARWIN_M20-9980346 [mm]
  rect 1.605x1.605 / inner round 1.605 / far side rect 1.605x1.605 hole 1.07: 1(-2.54,-1.27)
  round 1.605 hole 1.07: 2(-2.54,1.27) 3(0,-1.27) 4(0,1.27) 5(2.54,-1.27) 6(2.54,1.27)
  silkscreen extent -4.47,-2.54 3.81,2.54, body extent -3.81,-2.54 3.81,2.54, height 8.64
M3_HOLE [mm]
  round 3.2 hole 3.2 unplated: ""(0,0)
  Keep-Out Layer lines w0.305: 2.999,-0.057 cw(c0,0) 3,0
SOD-123FL_MCC [mil]
  rect 23x41 smd paste+0 mask+0: 1(-72.5,0) 2(72.5,0)
  silkscreen extent -66,-42 66,42, body extent -76,-37 76,37, height 53
TE_2-1437667-4 [mil]
  rect 108x108 hole 72: 1(0,0)
  round 108 hole 72: 2(325,0)
  silkscreen extent -200,-410 515,118, body extent -200,-409 515,91, height 570
TEST_PAD [mil]
  round 60 smd: 1(0,0)

## Part data
C1 C3 C5: library part CMP-03422-001497-1, "CAP CER 22UF 25V X5R 0805", Capacitance=22uF, Case Code (Imperial)=0805, Case Code (Metric)=2012, Dielectric=X5R, Max Operating Temperature=85°C, Min Operating Temperature=-55°C, Package Quantity=3000, Tolerance=20%, Voltage Rating=25V, Case/Package=0805, Halogen Free="Halogen Free", Height=1.25mm, Lead Free="Lead Free", Length=0.079inch, Mount="Surface Mount", Packaging="Tape and Reel", RoHS Compliant=Yes, Termination=SMD/SMT, Thickness=0.057inch, Voltage Rating (DC)=25V, Weight=0.000194oz, Width=0.049inch
C2 C4 C6 C9 C11: library part CMP-2000-06110-2, "Cap Ceramic 10uF 50V X7R ±10% SMD 1210 +125°C Embossed T/R", Capacitance=10uF, Case Code (Imperial)=1210, Case Code (Metric)=3225, Dielectric=X7R, Max Operating Temperature=125°C, Min Operating Temperature=-55°C, Package Quantity=1, Tolerance=10%, Voltage=50V, Case/Package=1210, Depth=2.5mm, Height=2.5mm, Lead Free="Lead Free", Length=3.2mm, Material=Ceramic, Mount="Surface Mount", Packaging="Tape and Reel", Radiation Hardening=No, Thickness=0.106inch, Voltage Rating=50V, Voltage Rating (DC)=50V, Width=0.098inch
C7 C8 C10: library part CMP-03422-001490-1, "CC0603JRX7R9BB104 / CAP CER 0.1UF 50V X7R 0603", Capacitance=100nF, Case Code (Imperial)=0603, Case Code (Metric)=1608, Dielectric=X7R, Manufacturer=Yageo, Manufacturer Part Number=CC0603JRX7R9BB104, Max Operating Temperature=125°C, Min Operating Temperature=-55°C, Resistor Type=Ceramic, Tolerance=5%, Voltage Rating=50V, Case/Package=0603, Construction=Flat, Depth=0.8mm, Halogen Free="Halogen Free", Height=0.8mm, Lead Free="Lead Free", Length=1.6mm, Mount="Surface Mount", Number of Pins=2, Packaging="Tape and Reel", Radiation Hardening=No, RoHS Compliant=Yes, Series=CC, Termination=SMD/SMT, Thickness=0.035inch, Voltage Rating (DC)=50V, Weight=7.1E-05oz, Width=0.031inch
CR1 CR2 CR3: "No Description Available", Manufacturer_Name=MCC, Copyright="Copyright (C) 2025 Ultra Librarian. All rights reserved.", Manufacturer_Part_Number=SMF33A-TP
D1 D4 D5: library part CMP-22017-000005-2, "LED GREEN CLEAR CHIP SMD", Case Code (Imperial)=0603, Case Code (Metric)=1608, Color=Green, Forward Current=30mA, Forward Voltage=2.1V, Lens Color=Colorless, Max Operating Temperature=85°C, Min Operating Temperature=-55°C, Package Quantity=1, Power Dissipation=100mW, Reverse Voltage=5V, Test Current=10mA, Voltage=2V, Case/Package=0603, Depth=0.8mm, Dominant Wavelength=569nm, Height=0.8mm, Illumination Color=Green, Lead Free="Lead Free", Length=1.6mm, Lens Style=Clear, Lens Transparency=Clear, Luminous Intensity=6mcd, Mount="Surface Mount", Number of Elements=1, Number of LEDs=1, Number of Pins=2, Packaging="Tape and Reel", Power Rating=100mW, Radiation Hardening=No, Viewing Angle=130°, Wavelength=565nm, Width=0.8mm
D2 D3: library part CMP-08607-000053-1, "TVS DIODE 3.3V 6.8V SOD123FL", Breakdown Voltage=3.4V, Clamping Voltage=6.8V, Manufacturer=Littelfuse, Max Junction Temp=+150°C, Package=0, Peak Pulse Current=30A, Peak Pulse Power=200W, Reverse Standoff Voltage=3.3V, Temperature="-55°C to +150°C", Temperature Range Low=-55°C, Automotive=No, Category=Diode, ComponentLink2Description=Datasheet, ComponentLink2URL=https://www.littelfuse.com/~/media/electronics/datasheets/tvs_diodes/littelfuse_tvs_diode_smf3_3_datasheet.pdf.pdf, Device Class L1="Circuit Protection", Device Class L2="TVS Diodes", Device Class L3=unset, Digikey Description="TVS DIODE 3.3V 6.8V SOD123FL", Direction=Unidirectional, Height=1.08mm, Lead Free=Yes, Manufacturer Part Number=SMF3.3, Mouser Description="Diode TVS Single Uni-Dir 3.3V 1.2KW 2-Pin SOD-123FL T/R", Number Of Channels=1, Octopart=https://octopart.com/smf3.3-littelfuse-75449841, RoHS=TRUE, Standoff Height=0mm, Temperature Range High=+150°C
D6 D7: library part CMP-2000-05081-2, "TVS DIODE 7V/12V 14V/26V SOT23-3", Breakdown Voltage=7.5V, Capacitance=75pF, Clamping Voltage=26V, Manufacturer="Bourns Inc.", Package=SOT23, Peak Pulse Current=17A, Peak Pulse Power=400W, Reverse Standoff Voltage=12V, Temperature="-55°C to +150°C", Temperature Range High=+150°C, Temperature Range Low=-55°C, Automotive=No, Category=Diode, ComponentLink2Description=Datasheet, ComponentLink2URL=https://www.bourns.com/docs/Product-Datasheets/CDSOT23-SM712.pdf, Device Class L1="Circuit Protection", Device Class L2="TVS Diodes", Device Class L3=unset, Digikey Description="TVS DIODE 7V/12V 14V/26V SOT23-3", Direction=Bidirectional, Height=1.17mm, Ipc Land Pattern Name=SOT95P229X103-3, Lead Free=Yes, Manufacturer Part Number=CDSOT23-SM712, Mouser Description="Transient Voltage Suppressor, TVS, CDSOT23 Series, Unidirectional, 12 V, SOT-23, 3, 13.3 V", Number Of Channels=2, Octopart=https://octopart.com/cdsot23-sm712-bourns-7576327, RoHS=TRUE, Standoff Height=0.05mm
F1 F2 F3 F4 F5 F6: "5mm Low Profile Holder", Package=None, Availability="In Stock", Check_prices=https://www.snapeda.com/parts/4527/Keystone+Electronics/view-part/?ref=eda, MF=Keystone, MP=4527, Price=None, Purchase-URL=https://pricing.snapeda.com/search/part/4527/?ref=eda, SnapEDA_Link=https://www.snapeda.com/parts/4527/Keystone+Electronics/view-part/?ref=snap
J1: library part CMP-1502-00201-2, Contact Resistance=30mΩ, Current Rating=3A, Insulation Resistance=5GΩ, Max Operating Temperature=105°C, Min Operating Temperature=-55°C, Operating Supply Voltage=125V, Contact Plating=Gold, Depth=18.5mm, Gender=Female, Housing Material=Steel, Insulation Material=PBT, Length=39.2mm, Mount="Through Hole", NexarPartId=18818196, Number of Contacts=15, Number of Pins=15, Number of Rows=2, Orientation="Right Angle", Pitch=2.77mm, REACH SVHC=Unknown, RoHS=Compliant, Termination=SMD/SMT, Voltage Rating=125V, Width=12.5mm
J2 J5: Package=None, Availability=Unavailable, MP=M20-9980346, Price=None
J3: "Conn; Term Strip; Barrier; 2Pole; 8.26mmPitch; SnglRow; 22-12; Series 4DB; 20A; 150V", Package=None, Availability=Unavailable, MF="TE Connectivity", MP=4DB-P108-02, Price=None, SnapEDA_Link=https://www.snapeda.com/parts/4DB-P108-02/TE%20Connectivity%20AMP%20Connectors/view-part/2743721/?ref=snap, TE_purchase_URL=https://www.te.com/usa-en/product-2-1437667-4.html?te_bu=Cor&te_type=disp&te_campaign=seda_glo_cor-seda-global-disp-prtnr-fy19-seda-model-bom-cta_sma-317_1&elqCampaignId=32493
J4: "BNC JACK, RA, RECEPTACLE, 50 OHM", Package=None, Check_prices=https://www.snapeda.com/parts/73100-0105/Molex/view-part/?ref=eda, MF=Molex, MP=73100-0105, SnapEDA_Link=https://www.snapeda.com/parts/73100-0105/Molex/view-part/?ref=snap
P1: library part CMP-1712-00002-6, Color=Black, Contact Resistance=20mΩ, Current Rating=3A, Max Operating Temperature=125°C, Min Operating Temperature=-40°C, Operating Supply Voltage=250V, Connector Type="Male Pin", Contact Gender=Male, Contact Material=Copper, Contact Mating Length=5.9944mm, Contact Plating=Gold, Gender=Male, Height=8.94mm, Housing Material=PBT, Lead Free="Lead Free", Lead Pitch=2.54mm, Mount="Through Hole", NexarPartId=20081794, Number of Contacts=2, Number of Pins=2, Number of Positions=2, Number of Rows=1, Orientation=Vertical, Packaging=Bulk, Pitch=2.54mm, REACH SVHC="No SVHC", RoHS=Compliant, Termination="Through Hole", Voltage Rating=250V
P2: library part CMP-1502-01115-3, Color=Black, Contact Resistance=20mΩ, Current Rating=3A, Operating Supply Voltage=250V, Connector Type="Male Pin", Contact Material=Copper, Contact Mating Length=5.9944mm, Contact Plating=Gold, Gender=Male, Lead Pitch=2.54mm, Mount="Through Hole", NexarPartId=32855566, Number of Contacts=28, Number of Pins=28, Number of Positions=28, Number of Rows=2, Orientation=Vertical, Packaging=Bulk, Pitch=2.54mm, REACH SVHC=Unknown, RoHS=Compliant, Row Spacing=2.54mm, Termination=Solder
P7: library part CMP-1502-01131-3, Color=Black, Contact Resistance=20mΩ, Current Rating=3A, Operating Supply Voltage=250V, Connector Type="Male Pin", Contact Material=Copper, Contact Mating Length=5.9944mm, Contact Plating=Gold, Gender=Male, Lead Pitch=2.54mm, Mount="Through Hole", NexarPartId=32855576, Number of Contacts=36, Number of Pins=36, Number of Positions=36, Number of Rows=2, Orientation=Vertical, Packaging=Bulk, Pitch=2.54mm, REACH SVHC=Unknown, RoHS=Compliant, Row Spacing=2.54mm, Termination=Solder
Q1 Q2: library part CMP-2000-04934-1, "N-Channel Logic Level Enhancement Mode Field Effect Transistor, 1.7 V, -55 to 150 degC, 3-Pin SOT-23, RoHS, Tape and Reel", Manufacturer=Fairchild, Maximum Continuous Drain Current=0.17A, Maximum Drain Source Voltage=100V, Maximum Gate Source Voltage=±20V, Operating Temperature=-55to150degC, Package=3SOT-23, Package Description="3-Pin Small Outline Transistor, Body 2.92 x 1.325 mm, Pitch 0.95 mm", Package Reference=SOT23-3, Package Version="Rev. 12, 03/2016", Category=MOSFET, Channel Mode=Enhancement, Channel Type=N, Datasheet URL=https://www.fairchildsemi.com/datasheets/BS/BSS123.pdf, Datasheet Version=Jun-03, Manufacturer URL=https://www.fairchildsemi.com/, Mounting=SurfaceMount, Package URL=http://www.fairchildsemi.com/dwg/MA/MA03D.pdf, Packaging=Tape&Reel, Rad Hard=No, RDS-on=6000@10VmOhm, Typical Fall Time=2.4ns, Typical Rise Time=9ns, Typical Turn-Off Delay Time=17ns, Typical Turn-On Delay Time=1.7ns
Q3 Q4 Q9 Q10 Q11: library part CMP-013-00042-2, "Mosfet, P-Ch, 40V, 2.4A, 150Deg C, 0.72W", Case/Package=SOT-23, Continuous Drain Current (ID)=2.4A, Drain to Source Voltage (Vdss)=40V, Input Capacitance=587pF, Manufacturer="Diodes Inc", Max Operating Temperature=150°C, Max Power Dissipation=720mW, Min Operating Temperature=-55°C, Manufacturer Part Number=DMP4065SQ-7, Rds On Max=80mR
Q5 Q6 Q7 Q8 Q12 Q13 Q14: library part CMP-013-00035-1, "Transistor MOSFET Negative Channel 100 Volt 0.17A 3-Pin SOT-23", Case/Package=SOT-23, Continuous Drain Current (ID)=170mA, Drain to Source Breakdown Voltage=100V, Drain to Source Resistance=1.2R, Drain-source On Resistance-Max=6R, Gate to Source Voltage (Vgs)=20V, Manufacturer="On Semi", Max Operating Temperature=150°C, Max Power Dissipation=360mW, Min Operating Temperature=-55°C, Drain to Source Voltage (Vdss)=100V, Manufacturer Part Number=BSS123, Nominal Vgs=1.7V, Polarity=N-CHANNEL, Turn-Off Delay Time=17ns, Turn-On Delay Time=1.7ns, Voltage Rating (DC)=100V
R1: library part CMP-03412-024244-1, "RES SMD 1.2K OHM 1% 1/8W 0805", Manufacturer=Yageo, Package=RT0805, Power Rating=0.125W, Resistance=1.2KΩ, Temperature="-55°C to +155°C", Temperature Coefficient="50 ppm/°C", Temperature Range High=+155°C, Temperature Range Low=-55°C, Tolerance=0.0001, Voltage Rating=150V, Automotive=No, Category=Res, ComponentLink2Description=Datasheet, ComponentLink2URL=http://www.yageo.com/documents/recent/PYu-RT_1-to-0.01_RoHS_L_9.pdf, Composition="Thin Film", Device Class L1="Passive Components", Device Class L2=Resistors, Device Class L3="Chip SMD Resistors", Digikey Description="RES SMD 1.2K OHM 1% 1/8W 0805", Footprint Url=http://www.yageo.com/exep/pages/download/literatures/PYu-R_Mount_10.pdf, Height=0.6mm, Ipc Land Pattern Name=RESC200125X50, Lead Free=Yes, Manufacturer Part Number=RT0805FRE071K2L, Mouser Description="Thin Film Resistors - SMD 1/8W 1.2K ohm 1% 50ppm", Octopart=https://octopart.com/rt0805fre071k2l-yageo-40048706, RoHS=TRUE, Series=RT
R2: library part CMP-2001-01705-2, "RES SMD 40.2K OHM 0.1% 1/8W 0805", Manufacturer=Yageo, Package=RT0805, Power Rating=0.125W, Resistance=40.2KΩ, Temperature="-55°C to +155°C", Temperature Coefficient="50 ppm/°C", Temperature Range High=+155°C, Temperature Range Low=-55°C, Tolerance=0.0025, Voltage Rating=150V, Automotive=No, Category=Res, ComponentLink2Description=Datasheet, ComponentLink2URL=http://www.yageo.com/documents/recent/PYu-RT_1-to-0.01_RoHS_L_9.pdf, Composition="Thin Film", Device Class L1="Passive Components", Device Class L2=Resistors, Device Class L3="Chip SMD Resistors", Digikey Description="RES SMD 40.2K OHM 0.1% 1/8W 0805", Footprint Url=http://www.yageo.com/exep/pages/download/literatures/PYu-R_Mount_10.pdf, Height=0.6mm, Ipc Land Pattern Name=RESC200125X50, Lead Free=Yes, Manufacturer Part Number=RT0805BRE0740K2L, Octopart=https://octopart.com/rt0805bre0740k2l-yageo-1373674, RoHS=TRUE, Series=RT
R3 R4 R5 R6 R9 R16 R17 R18 R19 R20 R21 R24 R25 R28 R29 R30 R34 R35 R36 R37 R38: library part CMP-03412-023097-1, "RES 10.0K OHM 1/8W 1% SMD 0805", Manufacturer=Yageo, Package=RT0805, Power Rating=0.125W, Resistance=10KΩ, Temperature="-55°C to +155°C", Temperature Coefficient="50 ppm/°C", Temperature Range High=+155°C, Temperature Range Low=-55°C, Tolerance=0.0001, Voltage Rating=150V, Automotive=No, Category=Res, ComponentLink2Description=Datasheet, ComponentLink2URL=http://www.yageo.com/documents/recent/PYu-RT_1-to-0.01_RoHS_L_9.pdf, Composition="Thin Film", Device Class L1="Passive Components", Device Class L2=Resistors, Device Class L3="Chip SMD Resistors", Digikey Description="RES 10.0K OHM 1/8W 1% SMD 0805", Footprint Url=http://www.yageo.com/exep/pages/download/literatures/PYu-R_Mount_10.pdf, Height=0.6mm, Ipc Land Pattern Name=RESC200125X50, Lead Free=Yes, Manufacturer Part Number=RT0805FRE0710KL, Mouser Description="Thin Film Resistors 1/8W 10K ohm 1% 50ppm", Octopart=https://octopart.com/rt0805fre0710kl-yageo-40301150, RoHS=TRUE, Series=RT
R7: library part CMP-2001-01701-2, "RES SMD 510 OHM 1% 1/8W 0805", Manufacturer=Yageo, Package=RT0805, Power Rating=0.125W, Resistance=510Ω, Temperature="-55°C to +155°C", Temperature Coefficient="50 ppm/°C", Temperature Range High=+155°C, Temperature Range Low=-55°C, Tolerance=0.0001, Voltage Rating=150V, Automotive=No, Category=Res, ComponentLink2Description=Datasheet, ComponentLink2URL=http://www.yageo.com/documents/recent/PYu-RT_1-to-0.01_RoHS_L_9.pdf, Composition="Thin Film", Device Class L1="Passive Components", Device Class L2=Resistors, Device Class L3="Chip SMD Resistors", Digikey Description="RES SMD 510 OHM 1% 1/8W 0805", Footprint Url=http://www.yageo.com/exep/pages/download/literatures/PYu-R_Mount_10.pdf, Height=0.6mm, Ipc Land Pattern Name=RESC200125X50, Lead Free=Yes, Manufacturer Part Number=RT0805FRE07510RL, Mouser Description="Res Thin Film 0805 510 Ohm 1% 1/8W ±50ppm/°C Molded SMD SMD Paper T/R", Octopart=https://octopart.com/rt0805fre07510rl-yageo-1378875, RoHS=TRUE, Series=RT
R8: library part CMP-03412-000042-1, "Res Thin Film 0805 330K Ohm 1% 1/8W ±50ppm/°C Molded SMD SMD Paper T/R", Manufacturer=Yageo, Package=RT0805, Power Rating=0.125W, Resistance=330Ω, Temperature="-55°C to +155°C", Temperature Coefficient="50 ppm/°C", Temperature Range High=+155°C, Temperature Range Low=-55°C, Tolerance=0.0001, Voltage Rating=150V, Automotive=No, Category=Res, ComponentLink2Description=Datasheet, ComponentLink2URL=http://www.yageo.com/documents/recent/PYu-RT_1-to-0.01_RoHS_L_9.pdf, Composition="Thin Film", Device Class L1="Passive Components", Device Class L2=Resistors, Device Class L3="Chip SMD Resistors", Digikey Description="Res Thin Film 0805 330K Ohm 1% 1/8W ±50ppm/°C Molded SMD SMD Paper T/R", Footprint Url=http://www.yageo.com/exep/pages/download/literatures/PYu-R_Mount_10.pdf, Height=0.6mm, Ipc Land Pattern Name=RESC200125X50, Lead Free=Yes, Manufacturer Part Number=RT0805FRE07330RL, Mouser Description="Res Thin Film 0805 330K Ohm 1% 1/8W ±50ppm/°C Molded SMD SMD Paper T/R", Octopart=https://octopart.com/rt0805fre07330rl-yageo-39785396, RoHS=TRUE, Series=RT
R10 R11 R14 R15: library part CMP-03412-028725-1, "RES SMD 10 OHM 1% 1/8W 0805", Manufacturer=Yageo, Package=RT0805, Power Rating=0.125W, Resistance=10Ω, Temperature="-55°C to +155°C", Temperature Coefficient="50 ppm/°C", Temperature Range High=+155°C, Temperature Range Low=-55°C, Tolerance=0.0001, Voltage Rating=150V, Automotive=No, Category=Res, ComponentLink2Description=Datasheet, ComponentLink2URL=http://www.yageo.com/documents/recent/PYu-RT_1-to-0.01_RoHS_L_9.pdf, Composition="Thin Film", Device Class L1="Passive Components", Device Class L2=Resistors, Device Class L3="Chip SMD Resistors", Digikey Description="RES SMD 10 OHM 1% 1/8W 0805", Footprint Url=http://www.yageo.com/exep/pages/download/literatures/PYu-R_Mount_10.pdf, Height=0.6mm, Ipc Land Pattern Name=RESC200125X50, Lead Free=Yes, Manufacturer Part Number=RT0805FRE0710RL, Mouser Description="High Precision-High Stability Chip Resistor Thin Film 0805 10Ohm 1% Paper T/R", Octopart=https://octopart.com/rt0805fre0710rl-yageo-39855890, RoHS=TRUE, Series=RT
R12 R13: library part CMP-03412-013069-1, "RES SMD 100 OHM 1% 1/8W 0805", Manufacturer=Yageo, Package=RT0805, Power Rating=0.125W, Resistance=100Ω, Temperature="-55°C to +155°C", Temperature Coefficient="50 ppm/°C", Temperature Range High=+155°C, Temperature Range Low=-55°C, Tolerance=0.0001, Voltage Rating=150V, Automotive=No, Category=Res, ComponentLink2Description=Datasheet, ComponentLink2URL=http://www.yageo.com/documents/recent/PYu-RT_1-to-0.01_RoHS_L_9.pdf, Composition="Thin Film", Device Class L1="Passive Components", Device Class L2=Resistors, Device Class L3="Chip SMD Resistors", Digikey Description="RES SMD 100 OHM 1% 1/8W 0805", Footprint Url=http://www.yageo.com/exep/pages/download/literatures/PYu-R_Mount_10.pdf, Height=0.6mm, Ipc Land Pattern Name=RESC200125X50, Lead Free=Yes, Manufacturer Part Number=RT0805FRE07100RL, Mouser Description="Thin Film Resistors 100 OHM 1% 50PPM", Octopart=https://octopart.com/rt0805fre07100rl-yageo-39834046, RoHS=TRUE, Series=RT
R22 R23 R26 R27 R31 R32 R33: library part CMP-2001-01737-2, "RES 33.0K OHM 1/8W .1% SMD 0805", Manufacturer=Yageo, Package=RT0805, Power Rating=0.125W, Resistance=33KΩ, Temperature="-55°C to +155°C", Temperature Coefficient="25 ppm/°C", Temperature Range High=+155°C, Temperature Range Low=-55°C, Tolerance=0.0025, Voltage Rating=150V, Automotive=No, Category=Res, ComponentLink2Description=Datasheet, ComponentLink2URL=http://www.yageo.com/documents/recent/PYu-RT_1-to-0.01_RoHS_L_9.pdf, Composition="Thin Film", Device Class L1="Passive Components", Device Class L2=Resistors, Device Class L3="Chip SMD Resistors", Digikey Description="RES 33.0K OHM 1/8W .1% SMD 0805", Footprint Url=http://www.yageo.com/exep/pages/download/literatures/PYu-R_Mount_10.pdf, Height=0.6mm, Ipc Land Pattern Name=RESC200125X50, Lead Free=Yes, Manufacturer Part Number=RT0805BRD0733KL, Mouser Description="Thin Film Resistors - SMD 1/8W 33K ohm .1% 25ppm", Octopart=https://octopart.com/rt0805brd0733kl-yageo-1457874, RoHS=TRUE, Series=RT
TP1 TP2: "Just a Pad", Color=Orange,White, Flammability Rating="UL94 V-0", Forward Current=3A, Forward Voltage=1.08V, Manufacturer="Keystone Electronics", Manufacturer Part Number=5003, Package Quantity=10, Supplier Part Number=36-5003-ND, Body Material=PBT, Category=Connectors, ComponentLink1Description=https://datasheet.ciiva.com/4598/5000-5004-4598618.pdf?src-supplier=Mouser, ComponentLink1URL=https://datasheet.ciiva.com/4598/5000-5004-4598618.pdf?src-supplier=Mouser, ComponentLink2Description=https://datasheet.ciiva.com/16885/70182825-16885788.pdf?src-supplier=Allied+Electronics, ComponentLink2URL=https://datasheet.ciiva.com/16885/70182825-16885788.pdf?src-supplier=Allied+Electronics, ComponentLink3Description=https://datasheet.ciiva.com/1454/1703983-1454826.pdf?src-supplier=Element14, ComponentLink3URL=https://datasheet.ciiva.com/1454/1703983-1454826.pdf?src-supplier=Element14, ComponentLink4Description=https://datasheet.ciiva.com/22631/1703983-22631103.pdf?src-supplier=Element14, ComponentLink4URL=https://datasheet.ciiva.com/22631/1703983-22631103.pdf?src-supplier=Element14, Contact Material=Bronze, Contact Plating=Silver,Tin, Height=0.3inch, Inside Diameter=1.27mm, Lead Free="Lead Free", Length=7.62mm, Material=Nylon,Bronze,Silver, Mounting Technology="PCB,Through Hole", Outside Diameter=2.54mm, Packaging=Bulk, Pins=1, Plating=Silver, Pricing="1=0.39, 10=0.293, 25=0.2624, 100=0.2223, 500=0.18446, 1000=0.1739, 2500=0.1542, 5000=0.14312 (USD)", Radiation Hardening=No, Reach SVHC Compliant=No, RoHS=Yes, RoHS Compliant=Yes, Series=THM, Stock=130387, Supplier=Digikey, Termination="Through Hole", Weight=4.535924g, Width=6.35mm
U1: "DC-DC Regulated Power Supply Module, 2 Output, 12W, Hybrid", Manufacturer="Mean Well", Supplier Part Number=709-N7812-1PV, ComponentLink1Description=https://datasheet.octopart.com/N7812-1PV-Mean-Well-datasheet-155797355.pdf?src-supplier=TME, ComponentLink1URL=https://datasheet.octopart.com/N7812-1PV-Mean-Well-datasheet-155797355.pdf?src-supplier=TME, Manufacturer Part Number=N7812-1PV, Pricing="1=3.29, 10=3.23, 50=3.23, 100=3.23, 1000=3.18, 10000=2.86 (USD)", Reach SVHC Compliant=Yes, RoHS=No, RoHS Compliant=No, Stock=1473, Supplier=Mouser
U2: "Dc-Dc Converter, 5V, 1A Rohs Compliant: Yes", Manufacturer="Mean Well", Supplier Part Number=709-N7805-1PV, Category="Power Products", ComponentLink1Description=https://datasheet.octopart.com/N7805-1PV-Mean-Well-datasheet-155797355.pdf?src-supplier=TME, ComponentLink1URL=https://datasheet.octopart.com/N7805-1PV-Mean-Well-datasheet-155797355.pdf?src-supplier=TME, Manufacturer Part Number=N7805-1PV, Pricing="1=3.29, 10=3.23, 50=3.23, 100=3.19, 1000=2.98, 10000=2.66 (USD)", RoHS=No, Stock=204, Supplier=Mouser
U3: "Dc-Dc Converter, 3.3V, 1A Rohs Compliant: Yes", Manufacturer="Mean Well", Supplier Part Number=709-N7803-1PV, Category="Power Products", ComponentLink1Description=https://datasheet.octopart.com/N7803-1PV-Mean-Well-datasheet-155797355.pdf?src-supplier=TME, ComponentLink1URL=https://datasheet.octopart.com/N7803-1PV-Mean-Well-datasheet-155797355.pdf?src-supplier=TME, Manufacturer Part Number=N7803-1PV, Pricing="1=3.94, 10=3.88, 50=3.88, 100=3.23, 1000=3.12, 10000=2.92 (USD)", RoHS=No, Stock=21, Supplier=Mouser
U4: library part CMP-04875-000104-1, "IC TRANSCEIVER FULL 1/1 8SOIC", Case/Package=SOIC, Manufacturer="Texas Instruments", Max Operating Temperature=125°C, Min Operating Temperature=-40°C, Operating Supply Voltage=3.3V, Data Rate=50Mbps, Lead Free="Lead Free", Logic Function=Receiver, Manufacturer Part Number=SN65HVD77DR, Mount="Surface Mount", Number of Pins=8, Number of Transmitters=1, Packaging="Tape and Reel", Receiver Hysteresis=70mV, RoHS Compliant=Yes, Simplex/Duplex="Full Duplex"
U5 U6: library part CMP-09083-000016-1, "IC DGT POT 10KOHM 256TAP SOT23-8", Case/Package=SOT-23, Frequency=25MHz, Max Operating Temperature=125°C, Max Supply Current=3uA, Max Supply Voltage=5.5V, Min Operating Temperature=-40°C, Min Supply Voltage=2.7V, Package Quantity=1, Resistance=10kR, Resistance Tolerance=15%, Temperature Coefficient=35ppm/°C, -3db Bandwidth=1.2MHz, Contact Plating=Gold, Interface=SPI, Lead Free="Contains Lead", Memory Type=Volatile, Mount="Surface Mount", Nominal Supply Current=3uA, Number Of Channels=1, Number of Circuits=1, Number of Elements=1, Number of Pins=8, Number of Positions=256, Number of Taps=256, Operating Supply Current=3uA, Operating Supply Voltage=5.5V, Packaging="Tape and Reel", Quiescent Current=3uA, Radiation Hardening=No, REACH SVHC="No SVHC", RoHS Compliant=Yes, Series=-, Supply Current=3uA, Taper=Linear, Termination=SMD/SMT, Tolerance=15%

## Via types
v1: diameter 39.37, hole 19.68, Top Layer to GND2, 64 vias
v2: diameter 50, hole 28, Top Layer to GND2, 19 vias

## Nets (pads, with @x,y where several pads share a name; then routed paths per layer and width w, separated by ;. In a path a pad name is that pad's centre, name@x,y a point inside that pad or via, vN(x,y) a via of type N, cw(c..) or ccw(c..) an arc to the next point about the centre after c; other vN are vias at no path point)
+3V3: C7.2 C8.2 C9.1 C10.2 C11.1 D5.2 F6.2 J5.1 R9.1 R16.2 R17.2 R18.2 R19.2 R37.1 R38.1 U4.1 U5.2 U6.2 | length 1094.1
  Top Layer w10: D5.2 v1(1550,3160) ; U4.1 2601.09,4300.5 C7.2 2590.59,4237.36 2610,4217.95 v1(2610,4210) ; R9.1 v1(2770,4590) ; U6.2 4767.18,2310.67 4773.8,2304.06 4773.8,2301.66 4788.72,2286.73 4910.47,2286.73 4913.74,2290 v1(5000,2290) ; U5.2 4755.08,1957.2 4770,1942.28 C10.2 4857.87,1939.41 4877.52,1919.76 4910,1919.76 4942.48,1919.76 4977,1885.24 v1(4977,1855)
  other v1: 2870,4240 3310,4240 3550,4240
+5V: D4.2 F4.2 J5.3 P1.1 Q9.2 Q10.2 Q11.2 R28.2 R29.2 R30.2 | length 517.7
  Top Layer w10: D4.2 2300.19,3159.34 v2(2352.92,3159.34) ; Q10.2 4062.87,2355.55 R29.2 4070.06,2359 v1(4130,2359) ; Q11.2 4063.03,2006.02 4069.01,2012 v1(4122,2012) ; Q9.2 4068.26,2713.66 4073.59,2719 v1(4126,2719)
  other v2: 2340,2370 4145,2430 2340,2450 4144,2508.07 1905,3115 2005,3115 1905,3190 2005,3190
+24V: F1.1 F3.1 F5.1 J3.2
Button+: J1.9 J1.10 R2.1 | length 999
  Top Layer w20: J1.10 J1.9 1487.17,3662.83 1500.67,3662.83 1508.6,3654.9 1508.6,3641.4 1580,3570 2190,3570 2260.94,3640.94 2260.94,3652.28 R2.1
C1_Done_FPGA: P2.14 P7.20 R16.1 | length 3037.2
  Top Layer w10: R16.1 2945.91,4157.32 2953.62,4149.61 2953.62,4143.7 2996.31,4101.01 2996.31,3993.69 3030.45,3959.55 3030.45,3958.14 3047.83,3940.75 P2.14
  GND2 w10: P2.14 3530,3446.42 3542,3434.42 3542,1602 P7.20
C1_En: P7.14 Q7.3 | length 2522
  Top Layer w20: v1(2934,3571) 2939.24,3571 2948.21,3562.03 3018.72,3562.03 Q7.3
  GND2 w20: v1(2934,3571) 3368.5,3136.5 3368.5,2741.17 3358.41,2731.08 3358.41,1821.29 3360,1819.7 3360,1720 P7.14
C1_En_FPGA: P2.11 Q7.1 R26.2 | length 749.6
  Top Layer w10: P2.11 2970,4006.42 2970,3980 3000,3950 3000,3834 3070,3764 3070,3550.51 3034.75,3515.25 3013.28,3515.25 2982.6,3484.57 Q7.1 2982.6,3383.94 R26.2
C1_Fault_FPGA: P2.13 P7.18 R19.1 | length 3053.7
  Top Layer w10: R19.1 3043.92,4154.74 3043.92,4032.5 P2.13
  GND2 w10: P2.13 2999.35,3980.1 2999.35,3892.65 3516,3376 3516,1676 P7.18
C1_On_FPGA: P2.15 P7.22 | length 2799.1
  GND2 w10: P2.15 3197,3979.42 3197,3823 3568,3452 3568,1528 P7.22
C1_Pwr: P7.16 Q4.3 R25.2 | length 2437.6
  Top Layer w10: R25.2@3790,3361.34 3840.76,3361.34 3873.39,3393.98 Q4.3
  Top Layer w20: v1(3440,3180) 3580,3180 3752.45,3352.45 3783.79,3352.45 R25.2
  GND2 w20: P7.16 3490,1750 3490,3130 v1(3440,3180)
C1_Pwr_FPGA: J2.2 Q6.1 R23.2 | length 627.1
  Top Layer w10: J2.2 4341.42,3528.58 4410,3460 4410,3370 4396.21,3356.21 R23.2@4367.55,3356.21 ; Q6.1 4265.28,3360.63 4358.03,3360.63 R23.2
C1_RBG: P7.24 U5.1 | length 1257
  Top Layer w20: P7.24 3829.59,1689.59 4372.71,1689.59 4614.74,1931.61 U5.1
C2_Done_FPGA: P2.17 P7.32 R18.1 | length 3025.2
  Top Layer w10: R18.1 3243.92,4154.74 3243.92,4032.5 P2.17
  GND2 w10: P2.17 3298,3978.42 3298,3805.23 3926,3177.23 3926,1494 P7.32
C2_En: P7.26 Q8.3 | length 2318.9
  Top Layer w20: Q8.3 3381.28,3562.03 3437.97,3562.03 v1(3650,3350)
  GND2 w20: v1(3650,3350) 3710,3290 3710,2575 3664,2529 3664,1468.17 3680,1452.17 P7.26
C2_En_FPGA: P2.16 Q8.1 R27.2 | length 630.9
  Top Layer w10: P2.16 3147.83,3679.33 3342.6,3484.57 Q8.1 3338.66,3472.76 R27.2
C2_Fault_FPGA: P2.18 P7.30 R17.1 | length 3048.4
  Top Layer w10: R17.1 3147.72,4150.94 3159.06,4150.94 3196,4114 3196,3980.42 P2.18
  GND2 w10: P2.18 3247.83,3818.63 3900,3166.46 3900,1472.17 3880,1452.17 P7.30
C2_On_FPGA: P2.19 P7.34 | length 2891.9
  GND2 w10: P2.19 3396.31,3980.1 3396.31,3743.69 3960,3180 3960,1560 P7.34
C2_Pwr: P7.28 Q3.3 R24.2 | length 1749.4
  Top Layer w20: R24.2 3802.52,2998.19 3810.24,2990.48 3810.24,2984.57 3846.1,2948.71 3861.65,2948.71 3865,2945.36 3865,3012.51 3892.02,3039.53 Q3.3
  GND2 w20: P7.28 3865,1525 v1(3865,2945)
C2_Pwr_FPGA: J2.4 Q5.1 R22.2 | length 1063.3
  Top Layer w10: J2.4 4278.19,3628.58 4436,3470.77 4436,3061.68 4372.52,2998.19 R22.2 4364.65,3000.16 4265.2,3000.16 Q5.1
C2_RBG: P7.36 U6.1 | length 1731.2
  Top Layer w20: P7.36 4660,1440 5012.69,1792.69 5012.69,2076.53 4869.22,2220 4695.55,2220 U6.1
CLK: P2.23 U5.4 U6.4 | length 2855.8
  Top Layer w10: P2.23 3599.25,4080 3932.63,4080 4640,3372.63 4640,2365.5 4636.35,2361.85 U6.4 ; U5.4 4636.35,2008.39 4640,2012.04 v1(4640,2070)
  GND2 w10: v1(4640,2070) v1(4640,2435)
CS1: P2.24 R38.2 U6.6 | length 2614.7
  Top Layer w10: R38.2 3485.91,4158.66 3498.62,4145.94 3498.62,4141.46 3500,4140.09 3500,3976.42 P2.24 3616.42,3860 4130,3860 4584.45,3405.55 4584.45,2353.58 4572.76,2341.9 4572.27,2341.9 4566.64,2336.26 U6.6
CS2: P2.20 R37.2 U5.6 | length 3103.6
  Top Layer w10: R37.2 3395,4148.66 3395,3975.75 P2.20 3448.42,3828 4112,3828 4480,3460 4480,2017.37 4513.06,1984.31 4545.16,1984.31 U5.6
Dump_Button-: D3.1 J1.4 P2.3 R4.2 | length 1150.3
  Top Layer w10: J1.4@1617.42,3932.58 1640,3910 R4.2 ; D3.1 1847.32,4015.59 R4.2 ; P2.3 2495.31,3976.06 2346.06,3976.06 2241.38,3871.38 1880.04,3871.38 1847.32,3904.09 R4.2
Dump_LED: D1.2 F2.2 J1.1 J1.2 J5.5 Q1.3 Q2.3 Q3.2 Q4.2 R2.2 R20.2 R21.2 | length 574.5
  Top Layer w10: D1.2 v1(3150,3160)
  Top Layer w20: R2.2 2355.67,3655.67 2355.67,3567.64 Q1.3 2510,3563.31 ; v1(2510,3440) 2510,3563.31 ; Q2.3 2510,3563.31
  other v2: 3140,2526 3140,2594
Dump_Signal_LED: P2.5 Q2.1 R6.2 | length 715.9
  Top Layer w10: R6.2 2620,3474.09 Q2.1 2622.6,3484.57 2653.28,3515.25 2674.75,3515.25 2700,3540.51 2700,3976.42 P2.5
Fire_Button-: D2.1 J1.3 P2.4 R3.2 | length 1111.1
  Top Layer w10: J1.3@1625.73,3824.27 1650,3800 D2.1 1832.91,3701.65 1848.66,3685.91 R3.2 ; D2.1@1832.91,3801.97 1853.5,3822.56 1855.47,3822.56 1882.91,3850 2469.25,3850 P2.4
Fire_Signal_LED: P2.6 Q1.1 R5.2 | length 734.6
  Top Layer w10: R5.2 2318.66,3472.76 Q1.1 2322.6,3688.15 2437.55,3803.11 2522.36,3803.11 P2.6
GND: C1.2 C2.2 C3.2 C4.2 C5.2 C6.2 C7.1 C8.1 C9.2 C10.1 C11.2 CR1.2 CR2.2 CR3.2 D2.2 D3.2 D6.3 D7.3 J1.11 J1.12 J1.13 J1.14 J1.15 J1.M1 J1.M2 J3.1 J5.2 J5.4 J5.6 P1.2 P7.1 P7.3 P7.5 P7.7 P7.9 P7.11 P7.13 P7.15 P7.17 P7.19 P7.21 P7.23 P7.25 P7.27 P7.29 P7.31 P7.33 P7.35 Q1.2 Q2.2 Q5.2 Q6.2 Q7.2 Q8.2 Q12.2 Q13.2 Q14.2 R1.2 R3.1 R4.1 R5.1 R6.1 R7.2 R8.2 R22.1 R23.1 R24.1 R25.1 R26.1 R27.1 R31.1 R32.1 R33.1 R34.1 R35.1 R36.1 U1.2 U2.2 U3.2 U4.4 U5.3 U5.7 U6.3 U6.7 | length 3429.8
  Top Layer w10: D7.3 v1(1960,4275) ; D6.3 v1(1960,4630) ; R4.1 1930,4012.91 1950,4032.91 v1(1950,4110) ; R3.1 R3.1@1931.34,3685.91 ; D2.2 1931.34,3784.25 R3.1@1931.34,3685.91 ; v1(1980,3680) 1937.24,3680 R3.1@1931.34,3685.91 ; Q1.2 2397.4,3383.94 R5.1 2400,3378.66 v1(2400,3320) ; v1(2510,4210) 2510,4217.95 2529.41,4237.36 C7.1 ; U4.4 2603.26,4547.17 2677.17,4547.17 v1(2680,4550) ; Q2.2 2702.68,3471.42 R6.1 2705,3377.68 v1(2705,3320) ; Q7.2 3061.34,3472.76 R26.1 3060,3378.66 v1(3060,3320) ; Q8.2 3421.34,3472.76 R27.1 3420,3378.66 v1(3420,3320) ; v1(3733,2357) 3794.32,2357 R35.1 ; v1(3737,2007) 3794.01,2007 R36.1 ; v1(3737.8,3471.73) 3743.42,3466.11 3759.32,3466.11 3784.09,3441.34 R25.1 ; R24.1 3802.52,3080.87 3836.03,3114.38 3845.38,3114.38 v1(3851,3120) ; v1(3801,2768) 3801,2719.55 R34.1 ; Q6.2@4247.16,3444.02 4251.93,3444.02 4260,3452.09 v1(4260,3480) ; v1(4254,3131) 4254,3086.16 Q5.2 4362.68,3076.93 R22.1 ; v1(4260,2770) 4260,2723.23 Q12.2 4272.13,2718.98 R31.1 ; Q6.2 4269.37,3431.34 R23.1@4360,3431.34 ; Q13.2 4260,2361.74 4264.8,2361.74 4277.48,2361.74 4287.36,2371.62 4287.36,2413.36 v1(4289,2415) ; Q13.2@4264.8,2360.87 4270.12,2360.87 R32.1 ; v1(4287,2069) 4287,2022.09 4276.25,2011.34 4271.25,2011.34 R33.1 ; U6.7 4581.58,2310.67 4601.53,2330.62 4607.66,2336.26 4760.08,2336.26 4773.8,2349.98 4773.8,2365.24 4846.26,2365.24 4877.99,2396.97 4910.47,2396.97 4913.5,2400 v1(5000,2400) ; U5.7 4569.49,1957.2 4575.13,1962.84 4575.61,1962.84 4594.06,1981.28 4631.81,1981.28 U5.3 4755.08,1982.8 4770,1997.72 C10.1 4848.11,2000.59 4877.52,2030 4936.3,2030 4925,2041.3 v1(4925,2085)
  other v1: 4650,1620 4690,1790 4692.13,2121.74 4690,2515 4690,2735 4690,2945 4690,3160 4690,3350 4570,3510 4420,3660 4280,3805 4140,3945 4005,4080 3560,4150 3805,4150
  other v2: 3650,2670 3650,2740 1430,2980 1540,2980 2230,2980 2335,2980 3035,2980 3135,2980
NetC1_1: C1.1 F2.1 U1.3
NetC2_1: C2.1 CR1.1 F1.2 U1.1
NetC3_1: C3.1 F4.1 U2.3
NetC4_1: C4.1 CR2.1 F3.2 U2.1
NetC5_1: C5.1 F6.1 U3.3
NetC6_1: C6.1 CR3.1 F5.2 U3.1
NetD1_1: D1.1 R1.1 | length 181.8
  Top Layer w10: R1.1 2920,3080 3000,3160 D1.1
NetD4_1: D4.1 R7.1 | length 202.3
  Top Layer w10: R7.1 2100,3080 2180,3160 D4.1
NetD5_1: D5.1 R8.1 | length 204
  Top Layer w10: R8.1 1310,3100 1370,3160 D5.1
NetQ3_1: Q3.1 Q5.3 R20.1 | length 224.8
  Top Layer w10: Q3.1 4061.3,3003.51 R20.1 4127.4,2998.19 4168.74,3039.53 Q5.3
NetQ4_1: Q4.1 Q6.3 R21.1 | length 218
  Top Layer w10: Q4.1@3964.52,3363.98 3967.15,3361.34 4070,3361.34 4115.49,3361.34 4141.19,3387.05 4154.13,3387.05 4156.61,3389.53 Q6.3@4156.61,3402.68
NetQ9_1: Q9.1 Q12.3 R28.1 | length 224.8
  Top Layer w10: Q9.1 4066.26,2641.62 R28.1 4132.36,2636.3 4173.7,2677.64 Q12.3
NetQ10_1: Q10.1 Q13.3 R29.1 | length 224.8
  Top Layer w10: Q10.1 4062.87,2283.51 R29.1 4128.98,2278.19 4170.31,2319.53 Q13.3
NetQ11_1: Q11.1 Q14.3 R30.1 | length 224.8
  Top Layer w10: Q11.1 4063.03,1933.98 R30.1 4129.13,1928.66 4170.47,1970 Q14.3
RS422-RX_N: D7.1 J1.6 R13.1 R14.1 | length 703.2
  Top Layer w15: J1.6 1611.81,4152.9 1626.32,4138.39 1626.32,4133.18 1635.11,4124.39 1647.54,4124.39 1707.88,4184.73 1707.88,4215.55 1779.83,4287.5 1802.61,4287.5 1811.4,4296.29 1811.4,4303.17 D7.1 1829.86,4321.63 1835.28,4321.63 1838.65,4325 2021.34,4325 R13.1 2035.91,4316.34 2046.12,4306.12 2046.12,4296.29 2054.91,4287.5 2114.82,4287.5 2123.61,4296.29 2123.61,4314.95 R14.1
RS422-RX_P: D7.2 J1.5 R10.1 R13.2 | length 703.2
  Top Layer w15: J1.5 1611.81,4070.88 1626.32,4085.39 1626.32,4090.6 1635.11,4099.39 1657.89,4099.39 1732.88,4174.37 1732.88,4205.19 1790.18,4262.5 1802.61,4262.5 1811.4,4253.71 1811.4,4246.83 D7.2 1829.86,4228.37 1835.28,4228.37 1838.65,4225 2021.34,4225 R13.2 2035.91,4233.66 2046.12,4243.88 2046.12,4253.71 2054.91,4262.5 2114.82,4262.5 2123.61,4253.71 2123.61,4235.05 R10.1
RS422-TX_N: D6.2 J1.7 R12.1 R15.2 | length 820.4